# Allegro board OC_Connect-1_DEBUG_Life-3.brd
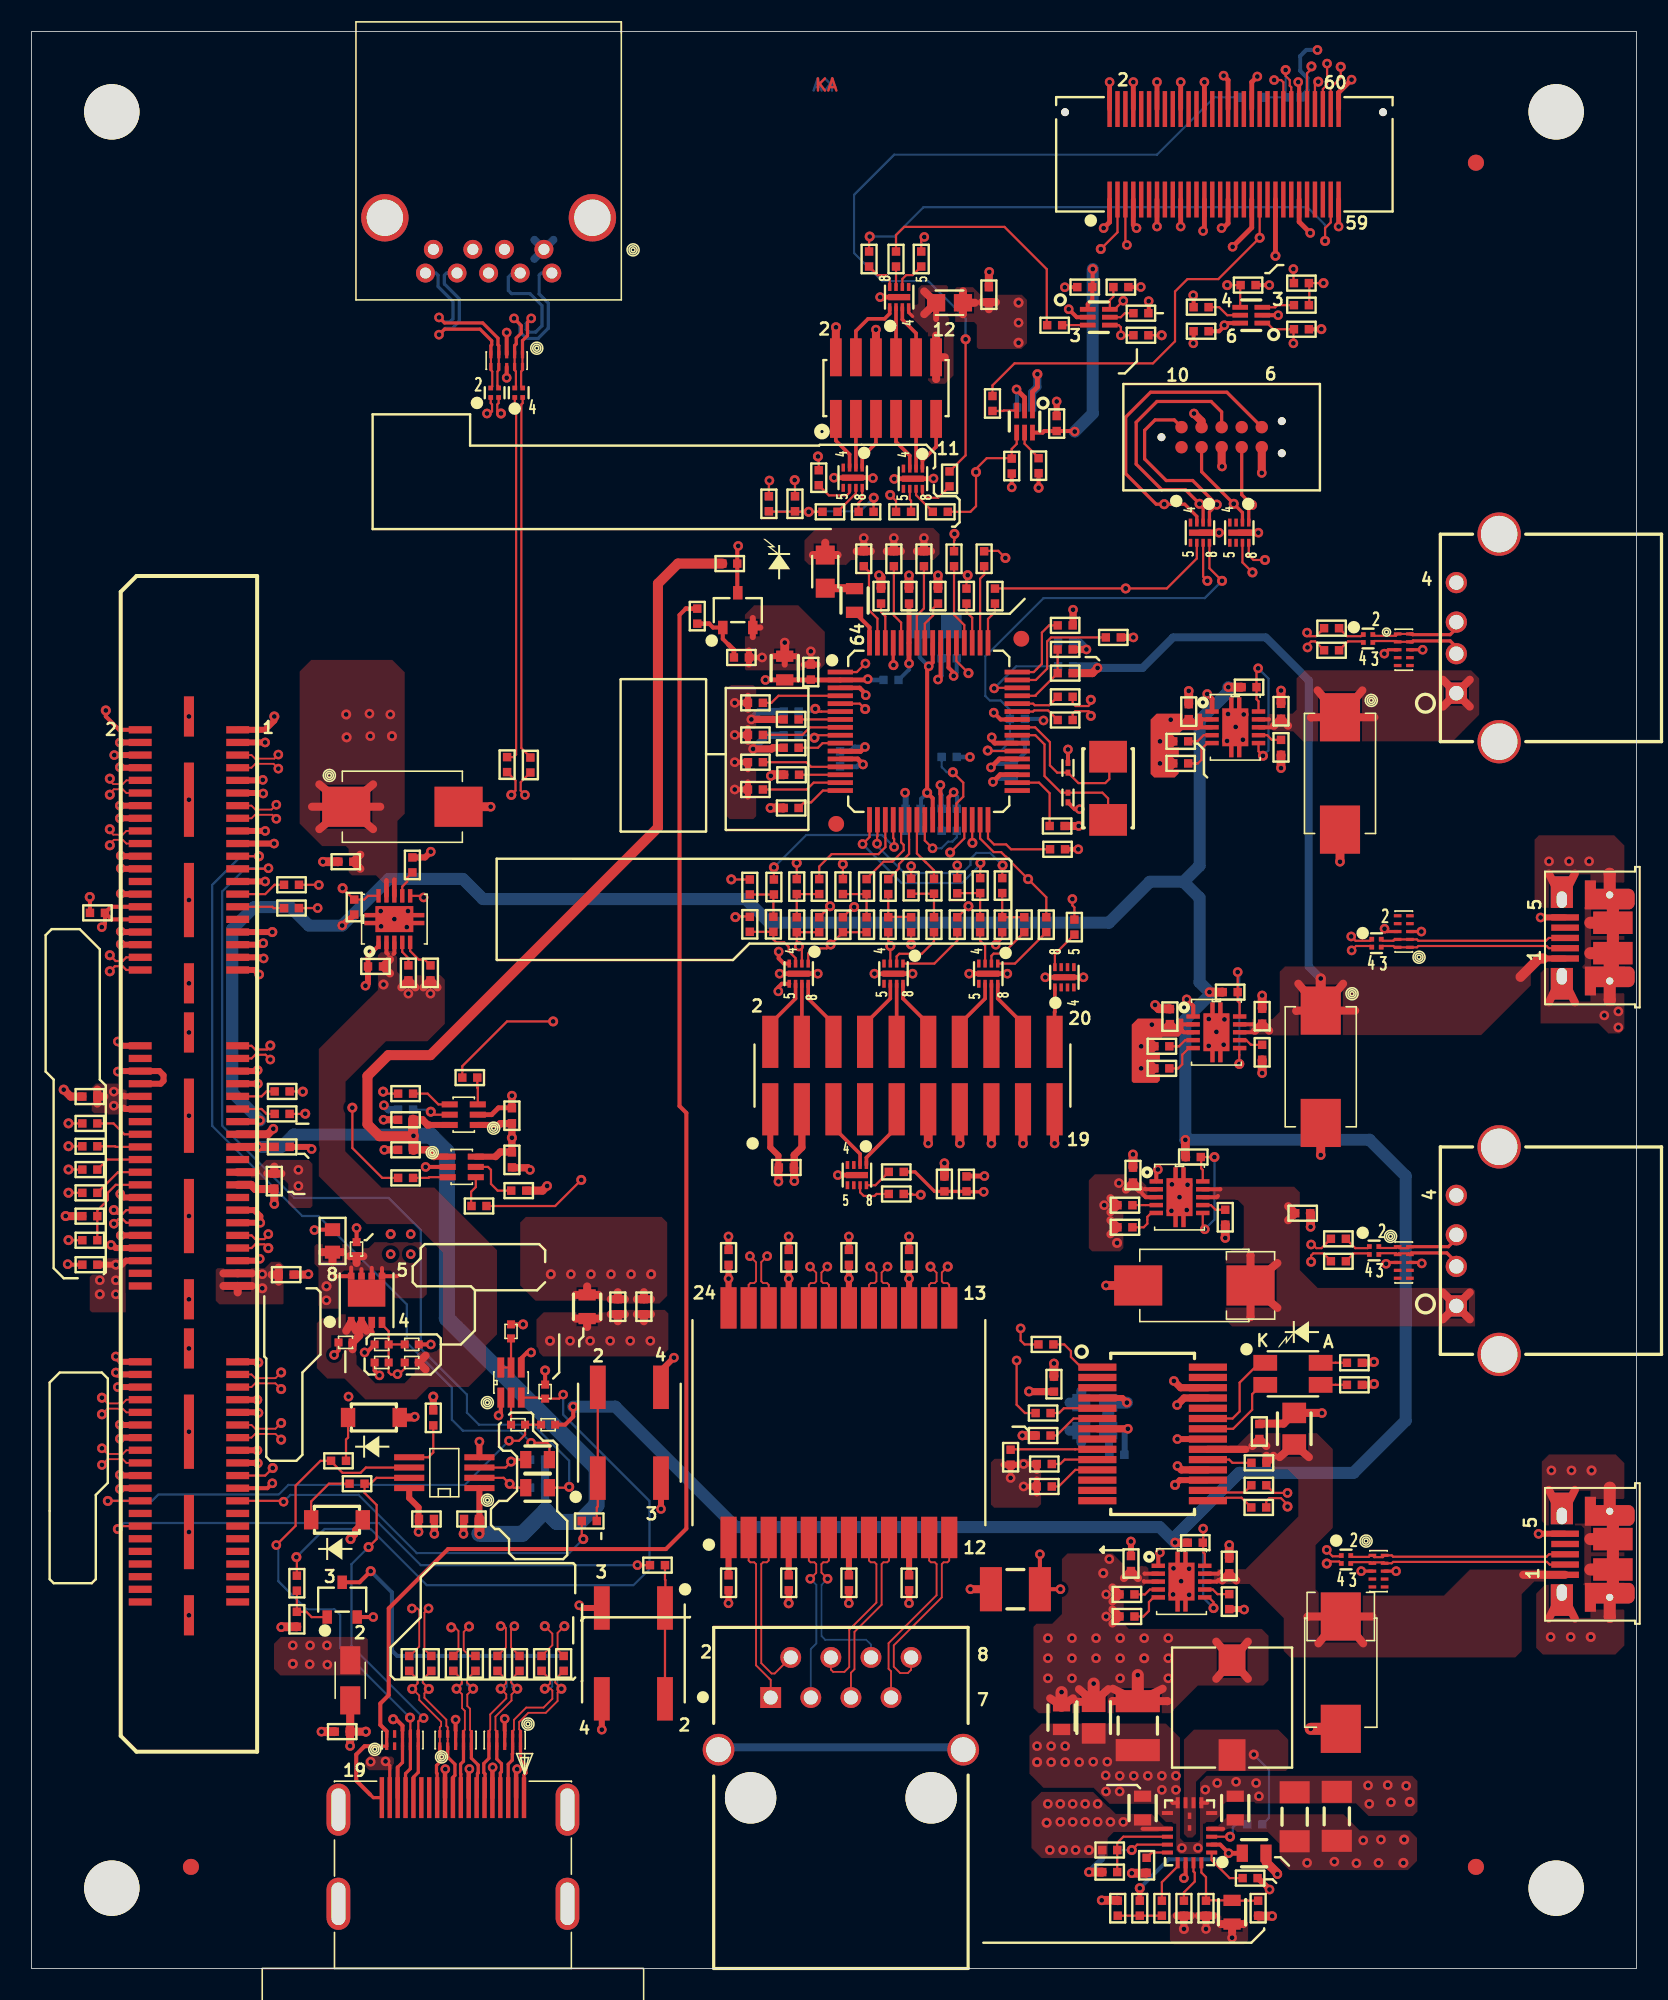
[diagram p0: board, top side]
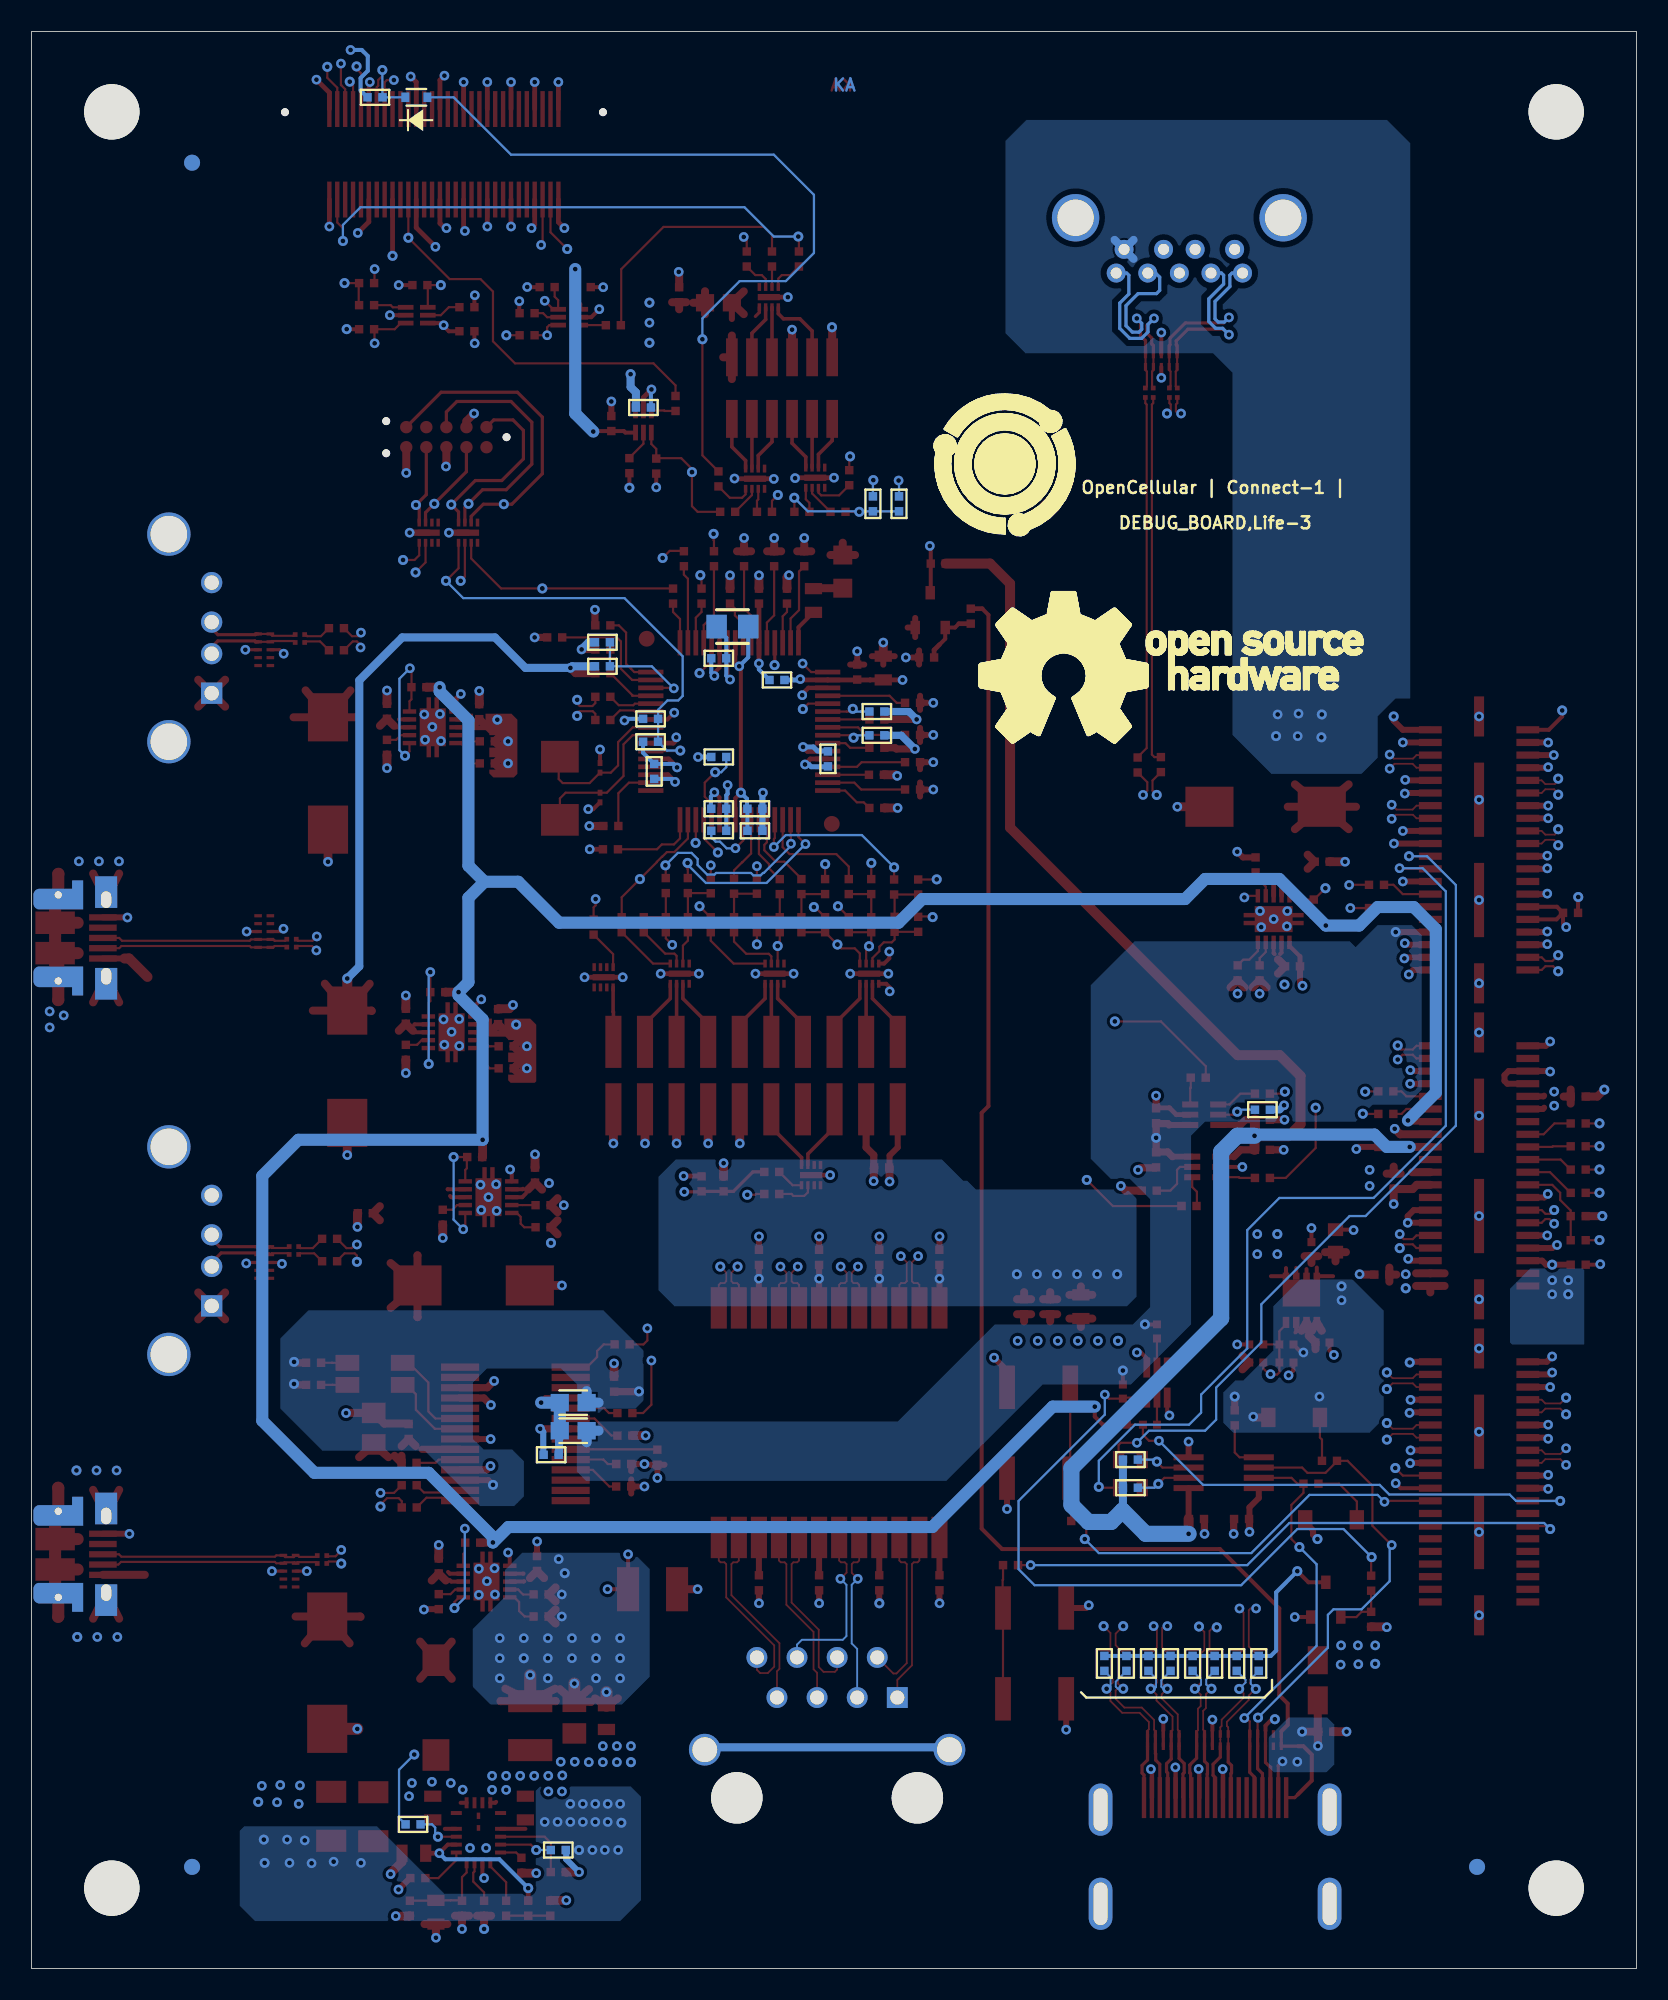
[diagram p1: board, bottom side, seen from below]

Outline 101.6 x 122.6 mm; copper layers: TOP, L2_GND, L3_SIG1, L4_SIG2, L5_PWR, BOTTOM. Coordinates in mm from the lower left corner of the outline.
Outline path: 0,122.6 0,0 101.6,0 101.6,122.6 0,122.6

## Design rules (mm)
constraint set DEFAULT: min track width 0.14
net group DEBUG_USB3_RX0: nets DEBUG_USB3_RX0_N DEBUG_USB3_RX0_P
net group DEBUG_USB3_TX0_N: nets DEBUG_USB3_TX0_N USB3_TX0_C_N
net group DEBUG_USB3_TX0_P: nets DEBUG_USB3_TX0_P USB3_TX0_C_P
net group DIFFPAIR0: nets N219413 N219434
net group DIFFPAIR1: nets N351992 N352004
net group DIFFPAIR2: nets N352148 N352158
net group DIFFPAIR3: nets USB_DN2 USB_DP2
net group DIFFPAIR6: nets N232751 N232773
net group DIFFPAIR7: nets N234973 N234985
net group DP3: nets UNNAMED_53_CHOKE4P_I472_IN2 UNNAMED_53_CHOKE4P_I472_OUT1
net group DP4: nets UNNAMED_53_CHOKE4P_I473_IN2 UNNAMED_53_CHOKE4P_I473_OUT1
net group DP5: nets GBE_MDI3N_DEBUG_C GBE_MDI3P_DEBUG_C
net group DP6: nets GBE_MDI2N_DEBUG_C GBE_MDI2P_DEBUG_C
net group DP7: nets GBE_MDI3N_DEBUG GBE_MDI3P_DEBUG
net group DP8: nets GBE_MDI1N_DEBUG_C GBE_MDI1P_DEBUG_C
net group DP9: nets GBE_MDI0N_DEBUG_C GBE_MDI0P_DEBUG_C
net group DP10: nets GBE_MDI0N_DEBUG GBE_MDI0P_DEBUG
net group DP11: nets GBE_MDI1N_DEBUG GBE_MDI1P_DEBUG
net group DP14: nets GBE_MDI2N_DEBUG GBE_MDI2P_DEBUG
net group DP15: nets C_USB_DN2 C_USB_DP2
net group DP16: nets C_ICDI_USB0DM C_ICDI_USB0DP
net group DP17: nets C_USB_DN1 C_USB_DP1
net group DP18: nets ICDI_USB0DM ICDI_USB0DP
net group DP19: nets USB_DN1 USB_DP1
net group DP20: nets USB_P_DN3 USB_P_DP3
net group HDMI_CLK_C_D: nets HDMI_CLK_DN HDMI_CLK_DP
net group HDMI_DATA0_C_D: nets HDMI_DATA0_DN HDMI_DATA0_DP
net group HDMI_DATA1_D: nets HDMI_DATA1_DN HDMI_DATA1_DP
net group HDMI_DATA2_DN: nets HDMI_DATA2_C_DN HDMI_DATA2_DN
net group HDMI_DATA2_DP: nets HDMI_DATA2_C_DP HDMI_DATA2_DP
net group HDMI_DDPC_SCL: nets HDMI_DDPC_SCL UNNAMED_18_RESN_I63_B
net group HDMI_DDPC_SDA: nets HDMI_DDPC_SDA UNNAMED_18_RESN_I62_B
net group HDMI_DDSP_HPD: nets HDMI_DDSP_HPD N385160
net group HDMI_SMB_SOC_CLK: nets HDMI_SMB_SOC_CLK PCU2_SMB_CLK
net group HDMI_SMB_SOC_DAT: nets HDMI_SMB_SOC_DAT PCU2_SMB_DAT
net group SLP_3P3_S0IX_B: nets SLP_3P3_S0IX_B UNNAMED_54_FET_I18_B
net group SOC_SLP_S0IX_B: nets SOC_SLP_S0IX_B UNNAMED_54_MOSFETNDUAL6P_I46_G1
net group N506634: nets N506634 UNNAMED_31_RESN_I19_A UNNAMED_31_RESN_I22_A UNNAMED_31_RESN_I23_A UNNAMED_31_RESN_I24_A
nets with their own width: min track width 0.762; nets V3P3_FT232

## Placement (name value [footprint] x y rotation side)
C1  10pF  [CC0201]  65.61 76 270 top
C1C5  0.1UF  [SMC0402A]  20.57 45.09 180 top
C1C6  0.1UF  [SMC0402A]  21.72 39.5 90 top
C1C8  0.01UF  [SMC0402A]  23.62 39.5 90 top
C1C9  1UF  [SMC0402A]  20.32 39.62 270 top
C1D1  220UF  [SMC7343_80TALL]  82.83 75.64 0 top
C1D2  220UF  [SMC7343_80TALL]  23.47 73.53 90 top
C1D3  220UF  [SMC7343_80TALL]  81.61 57.07 0 top
C1P1  0.1UF  [CC0402]  69.73 50.22 90 top
C1P2  0.1UF  [CC0402]  80.47 47.8 0 top
C1P3  220UF  [SMC7343_173TALL]  77.17 43.23 270 top
C1P4  0.1UF  [CC0402]  69.6 25.63 90 top
C1P5  0.1UF  [CC0402]  75.82 25.48 90 top
C1P6  220UF  [SMC7343_173TALL]  82.88 22.28 0 top
C2  10pF  [CC0201]  65.61 74.12 90 top
C2B1  0.01UF  [CC0402]  51.19 76.56 270 bottom
C2B2  0.01UF  [CC0402]  62.18 75.77 270 bottom
C2B3  0.01UF  [CC0402]  58.09 73.41 0 bottom
C2L1  0.1UF  [CC0402]  30.41 53.98 90 top
C2L2  0.1UF  [CC0402]  23.68 53.72 0 top
C2L3  0.1UF  [CC0402]  23.68 51.82 0 top
C2L4  0.1UF  [CC0402]  30.41 51.18 270 top
C2M1  0.1UF  [CC0402]  47.93 45.01 270 top
C2M2  0.1UF  [CC0402]  55.55 45.01 270 top
C2M3  0.1UF  [CC0402]  51.74 45.01 270 top
C2M4  0.1UF  [CC0402]  44.12 45.01 270 top
C2N1  1UF  [CC0603]  47.68 82.31 90 top
C2N2  0.1UF  [CC0402]  49.33 82.06 90 top
C2N3  2.2UF  [RC0805]  57.23 84.94 0 bottom
C2N4  0.1UF  [CC0402]  58.09 82.93 180 bottom
C2N5  0.1UF  [CC0402]  55.81 73.41 180 bottom
C2N6  0.1UF  [CC0402]  55.81 72.01 180 bottom
C3  1000PF  [CC0603]  35.17 41.88 270 top
C3P1  0.1UF  [CC0402]  64.72 36.98 90 top
C3P2  4.7UF  [CC0805]  79.94 34.16 90 top
C3P3  0.1UF  [CC0402]  77.73 33.99 90 top
C3P4  0.1UF  [CC0402]  25 28.45 0 top
C3P5  0.1UF  [CC0402]  27.85 28.45 0 top
C3P14  0.1UF  [CC0402]  68.71 32.51 0 bottom
C4  10NF  [CC0402]  37.11 41.88 270 top
C4B1  1000PF  [CC1210]  62.29 24 0 top
C4N1  0.1UF  [CC0402]  23.91 19.3 270 top
C4N2  0.1UF  [CC0402]  25.3 19.3 270 top
C4N3  0.1UF  [CC0402]  26.7 19.3 270 top
C4N4  0.1UF  [CC0402]  28.1 19.3 270 top
C4N5  0.1UF  [CC0402]  29.49 19.3 270 top
C4N6  0.1UF  [CC0402]  30.89 19.3 270 top
C4N7  0.1UF  [CC0402]  32.29 19.3 270 top
C4N8  0.1UF  [CC0402]  33.68 19.3 270 top
C4N9  0.1UF  [CC0402]  19.66 14.99 180 top
C4N15  10UF  [SMC0603]  19.05 45.34 90 top
C4P1  0.1UF  [CC0402]  79.1 79.58 90 top
C4P2  0.1UF  [CC0402]  73.26 79.55 90 top
C4P3  0.1UF  [CC0402]  30.1 76.2 270 top
C4P4  0.1UF  [CC0402]  31.58 76.17 270 top
C4P5  0.1UF  [CC0402]  19.89 70.05 180 top
C4P6  0.1UF  [CC0402]  21.77 63.42 180 top
C4P7  0.1UF  [CC0402]  77.91 60.27 90 top
C4P8  0.1UF  [CC0402]  72.06 60.25 90 top
C5  0.1uF  [CC0402]  38.76 41.88 270 top
C6  0.1uF  [CC0402]  3.69 44.55 180 top
C7  0.1uF  [CC0402]  47.78 50.7 0 top
C8  0.1uF  [CC0402]  3.69 55.19 180 top
C9  1uF  [CC0603]  65.21 15.88 270 top
C10  4.7UF  [CC0805]  67.24 15.88 270 top
C11  100uF  [CC1210]  70.03 15.37 270 top
C12  1uF  [CC0603]  70.34 10.15 90 top
C13  1uF  [CC0603]  76.2 10.15 90 top
C14  10uF  [CC1206]  82.63 9.63 90 top
C15  10uF  [CC1206]  79.96 9.6 90 top
C16  1uF  [CC0603]  77.4 7.29 0 top
C17  0.1uF  [CC0402]  70.59 6.53 270 top
C18  10pF  [CC0402]  74.35 3.81 270 top
C19  0.1uF  [CC0402]  62.41 79.1 0 bottom
C20  0.1uF  [CC0402]  15.37 49.83 270 top
C21  0.1uF  [CC0402]  15.86 52 0 top
C22  0.1uF  [CC0402]  77.45 9.12 0 bottom
C1990  0.1uF  [CC0402]  16.12 43.92 0 top
C2079  0.1uF  [CC0402]  60.6 105.94 270 top
C2100  0.1uF  [CC0402]  64.9 97.79 90 top
C2101  0.1uF  [CC0402]  62.87 98.81 180 bottom
C2102  0.1uF  [CC0402]  74.04 103.63 180 top
C2103  0.1uF  [CC0402]  80.39 103.76 0 top
C2104  0.1uF  [CC0402]  68.96 106.43 0 top
C2105  0.1uF  [CC0402]  66.67 106.43 180 top
C2138  0.1uF  [CC0402]  4.17 66.82 0 top
CR3P1  20V  [SOD123]  21.67 34.87 90 top
CR3P2  20V  [SOD123]  19.33 28.4 90 top
D1  GREEN  [LEDC2012X80N_1K]  50.25 88.42 90 top
D2  SML-LX1210IGC-TR  [LED_SM1210BC-SRHG]  79.86 37.64 90 top
D133  PMEG3002AEB  [SODFL1608X65N_AEE]  77.24 118.44 180 bottom
F4N1  0.5A  [SMFUSE_0805]  20.17 16.97 180 top
FB16  120E  [INDC1608X95M]  58.12 105.44 0 top
FB17  120E  [INDC1608X95M]  67.31 35.81 0 bottom
FB18  120E  [INDC1608X95M]  67.31 34.04 0 bottom
J1  TC2050-IDC-NL  [TAGCONNNECT_TC2050-IDC-NL]  72.8 96.29 0 top
J1N1  CONN_USB2A  [TYCO292303-1]  90.2 80.72 90 top
J1N2  USB - micro B USB 2.0  [USB2_10103594]  99.91 65.23 90 top
J1N3  CONN_USB2A  [TYCO292303-1]  90.2 41.94 90 top
J1N4  USB - micro B USB 2.0  [USB2_10103594]  99.91 26.21 90 top
J2  eJTAG Header_20  [SAMTEC_TMM-110-01-T-D-SM]  46.77 54.38 0 top
J3  SS-7188S-A-NF  [CON_SS-7188S-A_RJ45]  46.79 17.14 0 top
J4  QTE-060-03-L-D-A-GP  [QTE-060-01-L-D-A-GP]  9.96 50.8 270 top
J4N1  RCPT_HDMI_19P_4MTG_RA  [RCPT_HDMI_19P_05MM_RA_SM_H6P08]  26.67 6.6 0 top
J4P1  USB A USB 3.0  [USB3_10117835]  28.94 110.82 180 top
J118  eJTAG Header_12  [HARWIN_M50-3600642]  50.92 98.08 0 top
J119  DEBUG CONNECTOR  [SAMTEC_BSH-030-01-L-D-A-TR]  68.25 111.97 0 top
L1  2.2uH  [WURTH_744777910]  76 16.51 180 top
L1M1  749022016  [XFMR_749022016]  51.11 34.54 90 top
L1P1  90OHM  [CHK_DLP0NSN900HL2L]  84.99 45.44 0 top
L4P1  90OHM  [CHK_DLP0NSN900HL2L]  84.61 84.18 0 top
L4P2  90OHM  [CHK_DLP0NSN900HL2L]  29.32 99.74 90 top
L4P3  90OHM  [CHK_DLP0NSN900HL2L]  30.84 99.74 90 top
L4P4  90OHM  [CHK_DLP0NSN900HL2L]  85.14 64.9 0 top
L4P5  90OHM  [CHK_DLP0NSN900HL2L]  83.21 25.88 0 top
NOREF  -  []  15.78 0 90 top
NOREF#2  -  [unnamed#2]  5.08 5.08 0 top
NOREF#3  -  [unnamed#3]  10.09 6.43 0 top
NOREF#4  -  []  0 0 0 top
NOREF#5  -  [unnamed#2]  5.08 117.52 0 top
NOREF#6  -  []  5.08 117.52 0 top
NOREF#7  -  [unnamed#3]  91.44 114.3 0 top
NOREF#8  -  []  0 0 90 top
NOREF#9  -  []  96.52 5.08 90 top
NOREF#10  -  [unnamed#2]  96.52 117.52 0 top
NOREF#11  -  []  0 18.58 0 top
NOREF#12  -  [unnamed#3]  91.44 6.43 0 top
NOREF#13  -  [unnamed#2]  96.52 5.08 0 top
NOREF#14  -  [unnamed#3]  91.44 6.43 180 bottom
NOREF#15  -  [unnamed#3]  10.09 6.43 180 bottom
NOREF#16  -  [unnamed#3]  91.44 114.3 180 bottom
Q1C1  FET  [SOT95P251X112-3L]  44.71 85.98 0 top
Q1C2  FET  [SOT95P251X112-3L]  19.66 23.34 0 top
Q1C100  MOSFET_P_SING  [MOSFET_FDMC8878]  21.21 42.29 0 top
Q3N1  FDG6301N  [SC70_6P]  30.35 37.08 90 top
R1  10K  [RC0402]  52.68 89.23 90 top
R1C1  1K  [RC0402]  16.79 24.38 90 top
R1C2  619  [RC0402]  33.68 19.3 90 bottom
R1C3  619  [RC0402]  32.29 19.3 90 bottom
R1C4  619  [RC0402]  30.89 19.3 90 bottom
R1C5  619  [RC0402]  29.49 19.3 90 bottom
R1C6  619  [RC0402]  28.1 19.3 90 bottom
R1C7  619  [RC0402]  26.7 19.3 90 bottom
R1C8  619  [RC0402]  25.3 19.3 90 bottom
R1C9  619  [RC0402]  23.91 19.3 90 bottom
R1C16  100K  [SMR0402A]  22.61 38.35 270 top
R1C17  10K  [SMR0402A]  24.51 38.35 270 top
R1M1  75  [RC0402]  55.55 24.41 270 top
R1M2  75  [RC0402]  51.74 24.41 270 top
R1M3  75  [RC0402]  47.93 24.41 270 top
R1M4  75  [RC0402]  44.12 24.41 270 top
R1P1  10K  [RC0402]  73.55 51.36 0 top
R1P2  100K  [RC0402]  69.22 48.31 0 top
R1P3  100K  [RC0402]  69.22 46.91 0 top
R1P4  10K  [RC0402]  64.11 30.51 180 top
R1P5  10K  [RC0402]  73.67 26.95 0 top
R1P6  100K  [RC0402]  69.35 23.67 0 top
R1P7  100K  [RC0402]  69.35 22.28 0 top
R2  10K  [RC0402]  54.59 89.23 90 top
R2C4  4.7K  [SMR0402A]  30.35 40.77 0 top
R2C5  4.7K  [SMR0402A]  32.51 36.96 0 top
R2C6  0E  [SMR0402A]  31.24 34.42 270 top
R2C8  10K  [SMR0402A]  33.15 34.42 270 top
R3  10K  [RC0402]  56.49 89.23 90 top
R3A1  1K  [RC0402]  42.14 85.6 90 top
R3P1  10K  [RC0402]  25.43 34.85 270 top
R3P2  0  [RC0603]  32.03 32.21 180 top
R3P3  2.2K  [RC0402]  19.43 32.13 0 top
R3P4  2.2K  [RC0402]  20.6 30.68 180 top
R3P5  0  [RC0603]  32.03 30.43 180 top
R3P6  2.2K  [RC0402]  32.03 32.21 180 bottom
R3P7  2.2K  [RC0402]  32.03 30.43 180 bottom
R4  0E  [RC0402]  58.4 89.23 270 top
R4N1  100K  [RC0402]  44.94 82.98 0 top
R4P1  10K  [RC0402]  77.08 81.1 0 top
R4P2  100K  [RC0402]  72.75 77.67 0 top
R4P3  100K  [RC0402]  79.1 77.29 270 top
R4P4  100K  [RC0402]  72.75 76.28 0 top
R4P5  40.2K  [RC0402]  24.11 69.85 90 top
R4P6  10K  [RC0402]  20.43 67.18 90 top
R4P7  100K  [RC0402]  23.86 63.02 90 top
R4P8  100K  [RC0402]  25.25 63.02 90 top
R4P9  10K  [RC0402]  75.88 61.8 0 top
R4P10  100K  [RC0402]  71.56 58.37 0 top
R4P11  100K  [RC0402]  77.91 57.99 270 top
R4P12  100K  [RC0402]  71.56 56.97 0 top
R4P13  100K  [RC0402]  75.57 47.55 270 top
R4P14  100K  [RC0402]  75.82 23.22 270 top
R5  0E  [RC0402]  60.3 89.23 270 top
R6  10K  [RC0402]  44.2 88.93 0 top
R7  10K  [RC0402]  53.78 86.87 90 top
R8  33E  [RC0402]  55.55 86.87 90 top
R9  10K  [RC0402]  57.38 86.87 90 top
R10  0E  [RC0402]  59.19 86.87 270 top
R11  0E  [RC0402]  60.99 86.87 270 top
R12  330E  [RC0603]  52.1 86.59 90 top
R13  0  [RC0402]  82.3 84.84 180 top
R14  10K  [RC0402]  65.43 85.01 0 top
R15  0  [RC0402]  82.3 83.44 180 top
R16  10K  [RC0402]  68.48 84.25 0 top
R17  10K  [RC0402]  65.43 83.49 0 top
R18  0  [RC0402]  65.43 80.49 180 top
R19  10K  [RC0402]  45.83 80.11 180 top
R20  10K  [RC0402]  48.09 79.06 180 top
R21  0  [RC0402]  65.43 79.02 180 top
R22  10K  [RC0402]  45.83 78.08 180 top
R23  10K  [RC0402]  48.09 77.27 180 top
R24  10K  [RC0402]  45.83 76.35 180 top
R25  10K  [RC0402]  48.11 75.56 180 top
R26  10K  [RC0402]  45.83 74.63 180 top
R27  10K  [RC0402]  48.09 73.46 180 top
R28  0  [RC0402]  64.93 72.31 0 top
R30  0  [RC0402]  64.95 70.84 180 top
R32  0E  [RC0402]  60.05 68.54 90 top
R33  0E  [RC0402]  61.45 68.54 90 top
R34  0E  [RC0402]  58.6 68.53 270 top
R35  0E  [RC0402]  55.68 68.5 270 top
R36  0E  [RC0402]  57.13 68.5 90 top
R37  0E  [RC0402]  48.44 68.48 270 top
R38  0E  [RC0402]  49.86 68.48 90 top
R39  0E  [RC0402]  51.36 68.48 270 top
R40  0E  [RC0402]  52.86 68.48 90 top
R41  0E  [RC0402]  54.23 68.48 90 top
R42  0E  [RC0402]  45.47 68.45 270 top
R43  0E  [RC0402]  46.99 68.45 90 top
R46  0E  [RC0402]  45.47 66.09 90 top
R47  0E  [RC0402]  46.96 66.09 90 top
R48  0E  [RC0402]  48.44 66.07 90 top
R49  0E  [RC0402]  49.86 66.07 90 top
R50  0E  [RC0402]  51.36 66.07 90 top
R51  0E  [RC0402]  52.86 66.07 90 top
R52  0E  [RC0402]  54.23 66.07 90 top
R53  0E  [RC0402]  55.68 66.07 90 top
R54  0E  [RC0402]  57.13 66.07 90 top
R55  0  [RC0402]  58.6 66.07 270 top
R56  0  [RC0402]  60.05 66.07 270 top
R57  0E  [RC0402]  61.45 66.07 90 top
R58  0  [RC0402]  62.84 66.07 270 top
R59  0  [RC0402]  64.24 66.07 270 top
R60  0  [RC0402]  66.02 65.91 270 top
R63  0E  [RC0402]  3.69 46.09 180 top
R64  0  [RC0402]  27.74 56.39 0 top
R65  0  [RC0402]  23.68 55.37 180 top
R66  10K  [RC0402]  3.69 47.62 0 top
R67  0E  [RC0402]  3.69 49.09 180 top
R68  0E  [RC0402]  3.69 50.56 180 top
R69  0E  [RC0402]  3.69 52.04 180 top
R70  0  [RC0402]  54.74 50.42 0 top
R71  0  [RC0402]  23.68 50.04 180 top
R72  0E  [RC0402]  3.69 53.49 180 top
R73  0  [RC0402]  57.79 49.66 90 top
R74  10K  [RC0402]  59.19 49.66 270 top
R75  0  [RC0402]  54.74 49.02 0 top
R76  0  [RC0402]  28.33 48.26 180 top
R77  0  [RC0402]  82.73 46.18 180 top
R79  0  [RC0402]  82.73 44.76 180 top
R88  0  [RC0402]  64.22 39.5 180 top
R89  470  [RC0402]  83.75 38.34 180 top
R90  470  [RC0402]  83.75 36.94 180 top
R91  0  [RC0402]  64.04 35.15 180 top
R92  10K  [RC0402]  64.04 33.73 180 top
R93  10K  [RC0402]  61.98 32.36 270 top
R94  10K  [RC0402]  77.7 32 180 top
R95  10K  [RC0402]  64.11 31.93 180 top
R96  0  [RC0402]  77.7 30.58 180 top
R97  0  [RC0402]  77.69 29.18 180 top
R98  10K  [RC0402]  16.79 22.1 270 top
R99  100K  [RC0402]  68.25 7.49 180 top
R100  12K  [RC0402]  68.25 6.1 0 top
R101  0  [RC0402]  77.14 5.71 0 top
R102  10K  [RC0402]  68.76 3.81 90 top
R103  10K  [RC0402]  70.16 3.81 270 top
R104  0  [RC0402]  71.56 3.81 90 top
R105  100K  [RC0402]  72.95 3.81 90 top
R106  243K  [RC0402]  77.65 3.81 90 top
R107  1M  [RC0603]  76 3.56 270 top
R108  10K  [RC0402]  65.46 83.95 0 bottom
R109  5.6K  [RC0402]  65.46 82.42 0 bottom
R110  10K  [RC0402]  54.41 81.56 0 bottom
R111  10K  [RC0402]  48.09 79.56 180 bottom
R112  10K  [RC0402]  48.09 78.05 180 bottom
R113  10K  [RC0402]  62.41 77.65 180 bottom
R114  10K  [RC0402]  58.09 76.68 0 bottom
R115  10K  [RC0402]  58.09 72.01 0 bottom
R120  10K  [RC0402]  23.68 54.36 180 bottom
R122  0E  [RC0402]  15.86 54.09 180 top
R123  0E  [RC0402]  15.86 55.51 180 top
R124  0  [RC0402]  16.45 67.12 180 top
R125  0  [RC0402]  16.45 68.59 180 top
R126  41.2K  [RC0402]  68.25 7.49 180 bottom
R836  10K  [RC0402]  65.43 81.99 180 top
R10382  10K  [RC0402]  30.84 49.23 0 top
R10937  0  [RC0402]  52.83 92.2 0 top
R10938  0  [RC0402]  55.2 92.2 180 top
R10939  0  [RC0402]  57.53 92.2 0 top
R10942  0  [RC0402]  58.12 94.28 90 top
R10943  0  [RC0402]  49.83 94.36 90 top
R10947  0  [RC0402]  50.55 92.2 180 top
R10948  0  [RC0402]  53.02 108.2 270 top
R10949  0  [RC0402]  54.73 108.2 270 top
R10950  0  [RC0402]  56.32 108.2 270 top
R10951  100K  [RC0402]  79.86 118.44 180 bottom
R10952  0  [RC0402]  46.69 92.71 270 bottom
R10953  0  [RC0402]  46.68 92.71 270 top
R10954  0  [RC0402]  48.34 92.71 270 bottom
R10955  0  [RC0402]  48.33 92.71 270 top
R11018  10K  [RC0402]  63.75 95.12 270 top
R11020  0  [RC0402]  60.83 99.06 90 top
R11025  10K  [RC0402]  77.02 106.55 180 top
R11026  10K  [RC0402]  74.04 105.16 180 top
R11027  10K  [RC0402]  80.39 106.68 0 top
R11028  0  [RC0402]  80.39 105.28 0 top
R11029  10K  [RC0402]  70.23 103.38 180 top
R11030  10K  [RC0402]  70.23 104.78 0 top
R11032  0  [RC0402]  64.77 104.01 180 top
R11073  10K  [RC0402]  62.05 95.1 270 top
R11232  0E  [RC0402]  39.62 25.53 0 top
R11233  0E  [RC0402]  35.31 28.32 0 top
S4  SWITCH  [SW_B3SL-1022P]  38.1 19.94 90 top
S5  SWITCH  [SW_B3SL-1022P]  37.85 33.91 270 top
U1  IP4264CZ8  [SON40P135X170X55-9N]  73.97 90.88 270 top
U1P1  PUSB3F96  [XSON10_1X2P5_05MM]  30.08 101.77 180 top
U1P2  TPS2561  [MLF10_3X3_05MM_EP]  72.67 48.82 0 top
U1P3  IP4284CZ10  [XSON10_1X2P5_05MM]  86.87 44.69 270 top
U1P4  TPS2561  [MLF10_3X3_05MM_EP]  72.8 24.49 0 top
U2  IP4264CZ8  [SON40P135X170X55-9N]  76.46 90.88 270 top
U2L2  74AVC1T45  [SOT363]  28.25 53.39 180 top
U2L3  74AVC1T45  [SOT363]  26.34 51.38 0 top
U3  TM4C123GH6PM  [LQFP50P1200X1200X160-64N_TI]  56.8 78.31 0 top
U3P1  PCA9517A  [SSOP8_65MM_3W]  28.35 30.4 180 top
U4  IP4264CZ8  [SON40P135X170X55-9N]  48.57 62.97 270 top
U4N1  IP4284CZ10  [XSON10_1X2P5_05MM]  23.48 14.45 0 top
U4N2  PUSB3F96  [XSON10_1X2P5_05MM]  26.84 14.45 0 top
U4N3  PUSB3F96  [XSON10_1X2P5_05MM]  29.95 14.45 180 top
U4P1  PUSB3F96  [XSON10_1X2P5_05MM]  86.87 83.47 270 top
U4P2  TPS2561  [MLF10_3X3_05MM_EP]  76.2 78.56 0 top
U4P3  TPS2561  [MLF10_3X3_05MM_EP]  22.97 66.42 90 top
U4P4  IP4284CZ10  [XSON10_1X2P5_05MM]  86.87 65.63 90 top
U4P5  TPS2561  [MLF10_3X3_05MM_EP]  75.01 59.26 0 top
U4P6  PUSB3F96  [XSON10_1X2P5_05MM]  85.27 25.15 270 top
U5  IP4264CZ8  [SON40P135X170X55-9N]  54.57 62.97 270 top
U6  IP4264CZ8  [SON40P135X170X55-9N]  60.57 62.97 270 top
U7  IP4264CZ8  [SON40P135X170X55-9N]  65.38 62.74 90 top
U8  IP4264CZ8  [SON40P135X170X55-9N]  52.25 50.22 270 top
U9  FT232RL  [SSOP65P780_28]  70.97 33.83 0 top
U10  LT8640EUDC  [QFN50P300X400X80-20N]  73.31 8.59 270 top
U273  IP4264CZ8  [SON40P135X170X55-9N]  51.99 94.36 270 top
U274  IP4264CZ8  [SON40P135X170X55-9N]  55.8 94.3 270 top
U275  IP4264CZ8  [SON40P135X170X55-9N]  54.93 105.79 90 top
U289  SN74AVC1T45DRLR  [SOT-533_6P]  62.87 97.92 180 top
U290  SN74AVC1T45DRLR  [SOT-533_6P]  77.22 104.65 90 top
U291  SN74AVC1T45DRLR  [SOT-533_6P]  67.56 104.52 270 top
X1  16.000000MHZ  [XTAL_NX5032GA]  68.15 74.7 90 top

## Library data of the parts
C1-C4 C4B1 C5-C8 C17 C19-C22 C1990 C2079 C2100-C2105 C2138 = CAP_CER_0.1UF_10V_10%_X5R_0402
C1C5 C1C9 C2L1-C2L4 C2M1-C2M4 C4N1-C4N8 C4N15 = CAPN#2: signal model: CAPACITOR20PF
C1C6 C1C8 C2B1-C2B3 C2N1-C2N6 = CAPN#1: signal model: CAPACITOR20PF
C1D1-C1D3 C1P3 C1P6 = CAP_P: signal model: CAPACITOR20PF
C1P1 C1P2 C1P4 C1P5 C4N9 C4P1-C4P8 = CAPN: signal model: CAPACITOR20PF; room: 100
C3P1 C3P3 C3P14 = CAPN: signal model: CAPACITOR20PF
C3P2 C9-C16 C18 = CAP-NP_1
C3P4 C3P5 = CAPN#2: signal model: CAPACITOR20PF; room: 100
CR3P1 = SCHOTTKY: room: 100
CR3P2 = SCHOTTKY
D1 = LED_1
D2 = LED_DUAL_RED/GREEN_CLR_1210_SMD
D133 = DIODE_SCHOTTKY_30V_0.2A SOD523
F4N1 = FUSE_SMT
FB16-FB18 = FB_1
J1 = eJTAG Header_1
J1N1 J1N3 = CONN_USB2A_5
J1N2 = CONN_USB2A_12
J1N4 = CONN_USB2A_11
J2 = eJTAG Header_6
J3 = CON8_2
J4 = QTE-060-01-L-D-A-GP_2
J4N1 = RCPT_HDMI_19P_4MTG_RA: room: 100
J4P1 = CONN_USB3A_3
J118 = eJTAG Header_13
J119 = DEBUG CONNECTOR
L1 = INDUCTOR_2.8uH
L1M1 = TRANS-DA2125_0
L1P1 = CHOKE_0: signal model: CHOKE_4P
L4P1 L4P4 L4P5 = CHOKE_4P#1: signal model: CHOKE_4P
L4P2 L4P3 = CHOKE_4P
Q1C1 = FET
Q1C2 = FET#1
Q1C100 = MOSFET_P_SING_0
Q3N1 = MOSFETN_DUAL_6P
R1-R3 R6-R9 R12 R14 R16 R17 R19 R20 R22-R27 R66 R74 R92-R95 R98 R102 R103 R106-R115 R120 R126 R836 R10382 R11018 R11025-R11027 R11029 R11030 R11073 = R_1
R1C1-R1C9 R1M1-R1M4 R2C5 R2C6 R3P3-R3P7 R4P2 R4P7 R4P10 = RESN#1: signal model: RESISTOR50
R1C16 R1C17 R1P1 R1P4 R1P5 R2C4 R2C8 R3A1 R3P1 R4N1 R4P9 = RESN: signal model: RESISTOR50
R1P2 R1P3 R1P6 R1P7 R3P2 R4P3-R4P5 R4P8 R4P11-R4P14 = RESN#1: signal model: RESISTOR50; room: 100
R4 R5 R10 R11 R32-R43 R46-R60 R63 R67-R70 R72 R73 R75 R99-R101 R104 R105 R122-R125 R10937-R10939 R10942 R10943 R10947-R10955 R11020 R11028 R11032 R11232 R11233 = RES_1.0_OHM_1/16W_0402_SMD
R4P1 R4P6 = RESN_0: signal model: RESISTOR50
R13 R15 R18 R21 R28 R30 R64 R65 R71 R76 R77 R79 R88 R91 R96 R97 = RES_0.0_OHM_1/16W_0402_SMD
R89 R90 = RES_470_OHM_1/10W_5%_0402_SMD
S4 S5 = SWITCH_1
U1 U2 U4-U8 U273-U275 = TMP_152748
U1P1 U1P3 = IP4284CZ10: room: 100
U1P2 U1P4 = TPS2561_9
U2L2 U2L3 = 74AVC1T45
U3 = TM4C123GH6PM_SH
U3P1 = PCA9517A
U4N1-U4N3 = IP4284CZ10
U4P1 U4P4 U4P6 = IP4284CZ10_1: room: 100
U4P2 U4P3 U4P5 = TPS2561_8
U9 = IC_USB_SER_CONV_FT232RL_4
U10 = LT8610EMSE-EMSE16_0
U289-U291 = SN74LVC1T45DRLR_0
X1 = XTAL_4P_0

## Footprints (pads in the part's own frame, mm; a bottom-side part is the same pattern mirrored in y, then rotated)
CC0201
  rect 0.381x0.305 smd: 1(-0.305,0) 2(0.305,0)
CC0402
  rect 0.533x0.533 smd: 1(-0.475,0) 2(0.475,0)
CC0603
  rect 0.711x1.092 smd: 1(-0.75,0) 2(0.75,0)
CC0805
  rect 1.295x1.499 smd: 1(-1,0) 2(1,0)
CC1206
  rect 1.397x1.905 smd: 1(-1.55,0) 2(1.55,0)
CC1210
  rect 1.397x2.794 smd: 1(-1.55,0) 2(1.55,0)
CHK_DLP0NSN900HL2L
  rect 0.3x0.3 smd: 1(-0.3,0.25) 2(0.3,0.25) 3(0.3,-0.25) 4(-0.3,-0.25)
CON_SS-7188S-A_RJ45
  round 3.251 hole 3.251 unplated: (-1.27,-6.35) (10.16,-6.35)
  rect 1.321x1.321 hole 0.889: 1(0,0)
  round 1.321 hole 0.889: 2(1.27,2.54) 3(2.54,0) 4(3.81,2.54) 5(5.08,0) 6(6.35,2.54) 7(7.62,0) 8(8.89,2.54)
  round 2.007 hole 1.575: 9(-3.3,-3.3) 10(12.19,-3.3)
HARWIN_M50-3600642
  rect 0.74x2.4 smd: 1(0,0) 2(0,3.9) 3(1.27,0) 4(1.27,3.9) 5(2.54,0) 6(2.54,3.9) 7(3.81,0) 8(3.81,3.9) 9(5.08,0) 10(5.08,3.9) 11(6.35,0) 12(6.35,3.9)
INDC1608X95M
  rect 1.15x1.1 smd: 1(-0.85,0) 2(0.85,0)
LED_SM1210BC-SRHG
  rect 1x1.5 smd: 1(0.699,1.753) 2(-0.699,1.753) 3(0.699,-1.753) 4(-0.699,-1.753)
LEDC2012X80N_1K
  rect 1.2x1.2 smd: 1(1.05,0) 2(-1.05,0)
LQFP50P1200X1200X160-64N_TI
  round 1 smd: (-5.86,-5.86) (5.86,5.86)
  rect 1.6x0.3 smd: 1(-5.6,3.75) 2(-5.6,3.25) 3(-5.6,2.75) 4(-5.6,2.25) 5(-5.6,1.75) 6(-5.6,1.25) 7(-5.6,0.75) 8(-5.6,0.25) 9(-5.6,-0.25) 10(-5.6,-0.75) 11(-5.6,-1.25) 12(-5.6,-1.75) 13(-5.6,-2.25) 14(-5.6,-2.75) 15(-5.6,-3.25) 16(-5.6,-3.75) 33(5.6,-3.75) 34(5.6,-3.25) 35(5.6,-2.75) 36(5.6,-2.25) 37(5.6,-1.75) 38(5.6,-1.25) 39(5.6,-0.75) 40(5.6,-0.25) 41(5.6,0.25) 42(5.6,0.75) 43(5.6,1.25) 44(5.6,1.75) 45(5.6,2.25) 46(5.6,2.75) 47(5.6,3.25) 48(5.6,3.75)
  rect 0.3x1.6 smd: 17(-3.75,-5.6) 18(-3.25,-5.6) 19(-2.75,-5.6) 20(-2.25,-5.6) 21(-1.75,-5.6) 22(-1.25,-5.6) 23(-0.75,-5.6) 24(-0.25,-5.6) 25(0.25,-5.6) 26(0.75,-5.6) 27(1.25,-5.6) 28(1.75,-5.6) 29(2.25,-5.6) 30(2.75,-5.6) 31(3.25,-5.6) 32(3.75,-5.6) 49(3.75,5.6) 50(3.25,5.6) 51(2.75,5.6) 52(2.25,5.6) 53(1.75,5.6) 54(1.25,5.6) 55(0.75,5.6) 56(0.25,5.6) 57(-0.25,5.6) 58(-0.75,5.6) 59(-1.25,5.6) 60(-1.75,5.6) 61(-2.25,5.6) 62(-2.75,5.6) 63(-3.25,5.6) 64(-3.75,5.6)
MLF10_3X3_05MM_EP
  rect 0.85x0.28 smd: 1(-1.472,1) 2(-1.472,0.5) 3(-1.472,0) 4(-1.472,-0.5) 5(-1.472,-1) 6(1.472,-1) 7(1.472,-0.5) 8(1.472,0) 9(1.472,0.5) 10(1.472,1)
  custom 1.65x3.8 smd: 11(0,0)
MOSFET_FDMC8878
  rect 2.37x1.7 smd: (0,0.45)
  rect 0.42x0.7 smd: 1(-0.975,-1.4) 2(-0.325,-1.4) 3(0.325,-1.4) 4(0.975,-1.4)
  rect 0.42x0.45 smd: 5(0.975,1.525) 6(0.325,1.525) 7(-0.325,1.525) 8(-0.975,1.525)
QFN50P300X400X80-20N
  rect 0.25x0.7 smd: 1(1.25,1.4) 2(0.75,1.4) 3(0.25,1.4) 4(-0.25,1.4) 6(-1.25,1.4) 11(-1.25,-1.4) 13(-0.25,-1.4) 14(0.25,-1.4) 15(0.75,-1.4) 16(1.25,-1.4)
  rect 0.7x0.25 smd: 7(-1.9,0.75) 8(-1.9,0.25) 9(-1.9,-0.25) 10(-1.9,-0.75) 17(1.9,-0.75) 18(1.9,-0.25) 19(1.9,0.25) 20(1.9,0.75)
  rect 0.4x0.22 smd: 21(-1.075,0)
  rect 0.36x0.22 smd: 22(-0.305,0)
QTE-060-01-L-D-A-GP
  round 0 hole 1.016 unplated: (-29.242,2.032) (29.242,2.032)
  rect 0.457x1.448 smd: 1(-27.603,3.086) 2(-27.603,-3.086) 3(-26.803,3.086) 4(-26.803,-3.086) 5(-26.003,3.086) 6(-26.003,-3.086) 7(-25.203,3.086) 8(-25.203,-3.086) 9(-24.403,3.086) 10(-24.403,-3.086) 11(-23.603,3.086) 12(-23.603,-3.086) 13(-22.803,3.086) 14(-22.803,-3.086) 15(-22.003,3.086) 16(-22.003,-3.086) 17(-21.203,3.086) 18(-21.203,-3.086) 19(-20.403,3.086) 20(-20.403,-3.086) 21(-19.602,3.086) 22(-19.602,-3.086) 23(-18.802,3.086) 24(-18.802,-3.086) 25(-18.002,3.086) 26(-18.002,-3.086) 27(-17.202,3.086) 28(-17.202,-3.086) 29(-16.402,3.086) 30(-16.402,-3.086) 31(-15.602,3.086) 32(-15.602,-3.086) 33(-14.802,3.086) 34(-14.802,-3.086) 35(-14.002,3.086) 36(-14.002,-3.086) 37(-13.202,3.086) 38(-13.202,-3.086) 39(-12.402,3.086) 40(-12.402,-3.086) 41(-7.601,3.086) 42(-7.601,-3.086) 43(-6.801,3.086) 44(-6.801,-3.086) 45(-6.001,3.086) 46(-6.001,-3.086) 47(-5.201,3.086) 48(-5.201,-3.086) 49(-4.401,3.086) 50(-4.401,-3.086) 51(-3.6,3.086) 52(-3.6,-3.086) 53(-2.8,3.086) 54(-2.8,-3.086) 55(-2,3.086) 56(-2,-3.086) 57(-1.2,3.086) 58(-1.2,-3.086) 59(-0.4,3.086) 60(-0.4,-3.086) 61(0.4,3.086) 62(0.4,-3.086) 63(1.2,3.086) 64(1.2,-3.086) 65(2,3.086) 66(2,-3.086) 67(2.8,3.086) 68(2.8,-3.086) 69(3.6,3.086) 70(3.6,-3.086) 71(4.401,3.086) 72(4.401,-3.086) 73(5.201,3.086) 74(5.201,-3.086) 75(6.001,3.086) 76(6.001,-3.086) 77(6.801,3.086) 78(6.801,-3.086) 79(7.601,3.086) 80(7.601,-3.086) 81(12.402,3.086) 82(12.402,-3.086) 83(13.202,3.086) 84(13.202,-3.086) 85(14.002,3.086) 86(14.002,-3.086) 87(14.802,3.086) 88(14.802,-3.086) 89(15.602,3.086) 90(15.602,-3.086) 91(16.402,3.086) 92(16.402,-3.086) 93(17.202,3.086) 94(17.202,-3.086) 95(18.002,3.086) 96(18.002,-3.086) 97(18.802,3.086) 98(18.802,-3.086) 99(19.602,3.086) 100(19.602,-3.086) 101(20.403,3.086) 102(20.403,-3.086) 103(21.203,3.086) 104(21.203,-3.086) 105(22.003,3.086) 106(22.003,-3.086) 107(22.803,3.086) 108(22.803,-3.086) 109(23.603,3.086) 110(23.603,-3.086) 111(24.403,3.086) 112(24.403,-3.086) 113(25.203,3.086) 114(25.203,-3.086) 115(26.003,3.086) 116(26.003,-3.086) 117(26.803,3.086) 118(26.803,-3.086) 119(27.603,3.086) 120(27.603,-3.086)
  rect 2.54x0.635 smd: SH1(-28.448,0) SH4(-11.557,0) SH5(-8.445,0) SH8(8.445,0) SH9(11.557,0) SH12(28.448,0)
  rect 4.699x0.635 smd: SH2(-23.177,0) SH3(-16.828,0) SH6(-3.175,0) SH7(3.175,0) SH10(16.828,0) SH11(23.177,0)
RC0402
  rect 0.533x0.533 smd: 1(-0.475,0) 2(0.475,0)
RC0603
  rect 0.711x1.092 smd: 1(-0.75,0) 2(0.75,0)
RC0805
  rect 1.295x1.499 smd: 1(-1,0) 2(1,0)
RCPT_HDMI_19P_05MM_RA_SM_H6P08
  rect 0.279x2.591 smd: 1(4.5,4.21) 2(4,4.21) 3(3.5,4.21) 4(3,4.21) 5(2.5,4.21) 6(2,4.21) 7(1.5,4.21) 8(1,4.21) 9(0.5,4.21) 10(0,4.21) 11(-0.5,4.21) 12(-1,4.21) 13(-1.5,4.21) 14(-2,4.21) 15(-2.5,4.21) 16(-3,4.21) 17(-3.5,4.21) 18(-4,4.21) 19(-4.5,4.21)
  oval 1.499x3.302 hole 0.889x2.692: MH1(-7.25,3.45) MH2(7.25,3.45) MH3(-7.25,-2.51) MH4(7.25,-2.51)
SAMTEC_BSH-030-01-L-D-A-TR
  round 0.5 hole 1.02 unplated: (-2.82,5.53) (17.31,5.53)
  rect 0.279x2.273 smd: 1(0,0) 2(0,5.728) 3(0.5,0) 4(0.5,5.728) 5(1,0) 6(1,5.728) 7(1.5,0) 8(1.5,5.728) 9(2,0) 10(2,5.728) 11(2.5,0) 12(2.5,5.728) 13(3,0) 14(3,5.728) 15(3.5,0) 16(3.5,5.728) 17(4,0) 18(4,5.728) 19(4.5,0) 20(4.5,5.728) 21(5,0) 22(5,5.728) 23(5.5,0) 24(5.5,5.728) 25(6,0) 26(6,5.728) 27(6.5,0) 28(6.5,5.728) 29(7,0) 30(7,5.728) 31(7.5,0) 32(7.5,5.728) 33(8,0) 34(8,5.728) 35(8.5,0) 36(8.5,5.728) 37(9,0) 38(9,5.728) 39(9.5,0) 40(9.5,5.728) 41(10,0) 42(10,5.728) 43(10.5,0) 44(10.5,5.728) 45(11,0) 46(11,5.728) 47(11.5,0) 48(11.5,5.728) 49(12,0) 50(12,5.728) 51(12.5,0) 52(12.5,5.728) 53(13,0) 54(13,5.728) 55(13.5,0) 56(13.5,5.728) 57(14,0) 58(14,5.728) 59(14.5,0) 60(14.5,5.728)
SAMTEC_TMM-110-01-T-D-SM
  rect 1.02x3.3 smd: 1(0,0) 2(0,4.27) 3(2,0) 4(2,4.27) 5(4,0) 6(4,4.27) 7(6,0) 8(6,4.27) 9(8,0) 10(8,4.27) 11(10,0) 12(10,4.27) 13(12,0) 14(12,4.27) 15(14,0) 16(14,4.27) 17(16,0) 18(16,4.27) 19(18,0) 20(18,4.27)
SC70_6P
  rect 1.27x0.432 smd: 1(-0.953,0.648) 2(-0.953,0) 3(-0.953,-0.648) 4(0.953,-0.648) 5(0.953,0) 6(0.953,0.648)
SMC0402A
  rect 0.508x0.508 smd: 1(0,0) 2(0,-0.889)
SMC0603
  rect 0.813x0.965 smd: 1(0,0) 2(1.422,0)
SMC7343_80TALL
  rect 2.54x3.048 smd: 1(0,3.556) 2(0,-3.556)
SMC7343_173TALL
  rect 2.54x3.048 smd: 1(0,0) 2(0,-7.112)
SMFUSE_0805
  rect 1.27x1.778 smd: 1(0,0) 2(0,-2.54)
SMR0402A
  rect 0.508x0.508 smd: 1(0,0) 2(0,-0.889)
SOD123
  rect 1.22x0.91 smd: 1(0,1.635) 2(0,-1.635)
SODFL1608X65N_AEE
  rect 0.5x0.6 smd: A(0.7,0) K(-0.7,0)
SON40P135X170X55-9N
  rect 0.5x0.22 smd: 1(-0.64,0.6) 2(-0.64,0.2) 3(-0.64,-0.2) 4(-0.64,-0.6) 5(0.64,-0.6) 6(0.64,-0.2) 7(0.64,0.2) 8(0.64,0.6)
  rect 0.4x1.4 smd: 9(0,0)
SOT95P251X112-3L
  rect 0.6x0.85 smd: 1(-0.95,-1.1) 2(0.95,-1.1) 3(0,1.1)
SOT363
  rect 1.016x0.381 smd: 1(0,0) 2(0,-0.65) 3(0,-1.3) 4(1.778,-1.3) 5(1.778,-0.65) 6(1.778,0)
SOT-533_6P
  rect 0.305x0.991 smd: 1(-0.5,-0.7) 2(0,-0.7) 3(0.5,-0.7) 4(0.5,0.7) 5(0,0.7) 6(-0.5,0.7)
SSOP8_65MM_3W
  rect 1.905x0.381 smd: 1(0,0) 2(0,-0.65) 3(0,-1.3) 4(0,-1.951) 5(4.445,-1.951) 6(4.445,-1.3) 7(4.445,-0.65) 8(4.445,0)
SSOP65P780_28
  rect 2.413x0.457 smd: 1(-3.5,4.225) 2(-3.5,3.575) 3(-3.5,2.925) 4(-3.5,2.275) 5(-3.5,1.625) 6(-3.5,0.975) 7(-3.5,0.325) 8(-3.5,-0.325) 9(-3.5,-0.975) 10(-3.5,-1.625) 11(-3.5,-2.275) 12(-3.5,-2.925) 13(-3.5,-3.575) 14(-3.5,-4.225) 15(3.5,-4.225) 16(3.5,-3.575) 17(3.5,-2.925) 18(3.5,-2.275) 19(3.5,-1.625) 20(3.5,-0.975) 21(3.5,-0.325) 22(3.5,0.325) 23(3.5,0.975) 24(3.5,1.625) 25(3.5,2.275) 26(3.5,2.925) 27(3.5,3.575) 28(3.5,4.225)
SW_B3SL-1022P
  rect 2.75x1 smd: 1(2.875,-2) 2(-2.875,-2) 3(2.875,2) 4(-2.875,2)
TAGCONNNECT_TC2050-IDC-NL
  round 0.5 hole 1 unplated: (-1.27,0.635) (6.35,1.651) (6.35,-0.381)
  round 0.787 smd: 1(0,0) 2(1.27,0) 3(2.54,0) 4(3.81,0) 5(5.08,0) 6(5.08,1.27) 7(3.81,1.27) 8(2.54,1.27) 9(1.27,1.27) 10(0,1.27)
TYCO292303-1
  rect 1.346x1.346 hole 0.914: 1(0,0)
  round 1.346 hole 0.914: 2(2.5,0) 3(4.5,0) 4(7,0)
  round 2.743 hole 2.311: S1(10.07,-2.71) S2(-3.07,-2.71)
unnamed#2
  round 3.5 hole 3.5 unplated: (0,0)
unnamed#3
  round 1.016 smd: (0,0)
USB2_10103594
  rect 0.4x1.75 smd: 1(-1.3,2.825) 2(-0.65,2.825) 3(0,2.825) 4(0.65,2.825) 5(1.3,2.825)
  rect 2x1.4 hole 1.05x0.65: SH1(-2.425,3.03) SH2(2.425,3.03)
  custom 1.825x3.15 hole 0.7x1.2: SH3(-2.725,0) SH6(2.725,0)
  rect 1.425x2.5 smd: SH4(-0.963,-0.2) SH5(0.963,-0.2)
USB3_10117835
  round 1.2 hole 0.7: 1(-3.5,2) 2(-1,2) 3(1,2) 4(3.5,2) 5(4,3.5) 6(2,3.5) 7(0,3.5) 8(-2,3.5) 9(-4,3.5)
  round 3 hole 2.3: SH1(-6.57,0) SH2(6.57,0)
WURTH_744777910
  rect 1.7x2 smd: 1(0,3) 2(0,-3)
XFMR_749022016
  rect 2.62x1.02 smd: 1(-7.264,6.985) 2(-7.264,5.715) 3(-7.264,4.445) 4(-7.264,3.175) 5(-7.264,1.905) 6(-7.264,0.635) 7(-7.264,-0.635) 8(-7.264,-1.905) 9(-7.264,-3.175) 10(-7.264,-4.445) 11(-7.264,-5.715) 12(-7.264,-6.985) 13(7.264,-6.985) 14(7.264,-5.715) 15(7.264,-4.445) 16(7.264,-3.175) 17(7.264,-1.905) 18(7.264,-0.635) 19(7.264,0.635) 20(7.264,1.905) 21(7.264,3.175) 22(7.264,4.445) 23(7.264,5.715) 24(7.264,6.985)
XSON10_1X2P5_05MM
  rect 0.203x0.483 smd: 1(-1,-0.388) 2(-0.5,-0.388) 3(0,-0.388) 4(0.5,-0.388) 5(1,-0.388) 6(1,0.388) 7(0.5,0.388) 8(0,0.388) 9(-0.5,0.388) 10(-1,0.388)
XTAL_NX5032GA
  rect 2.007x2.388 smd: 1(-2,0) 2(2,0)

## Nets
3.3VD_TIVA: C2B1.1(A[0]) C2B2.1(A[0]) C2B3.1(A[0]) C2N1.1(A[0]) C2N2.1(A[0]) C2N4.1(A[0]) C7.1(A[0]) C8.1(A[0]) C20.1(A[0]) J2.1 J4.50 J4.52 J4.61 R66.1(A[0]) R74.1(A[0]) R110.1(A[0]) R113.1(A[0]) R115.1(A[0]) U3.2(VDDA) U3.11(VDD) U3.26(VDD1) U3.37(VBAT) U3.42(VDD2) U3.54(VDD3) U4.4 U4.5
12V_VIN_TIVA: C12.1(A[0]) C13.1(A[0]) C14.1(A[0]) C15.1(A[0]) C1990.1(A[0]) J4.77 J4.79 R99.2(B[0]) U10.4(VIN1) U10.13(VIN2)
GND: C1.1(A[0]) C1C5.2(B[0]) C1C8.2(B[0]) C1C9.2(B[0]) C1D1.2(B[0]) C1D2.2(B[0]) C1D3.2(B[0]) C1P1.2(B[0]) C1P2.2(B[0]) C1P3.2(B[0]) C1P4.2(B[0]) C1P5.2(B[0]) C1P6.2(B[0]) C2.1(A[0]) C2B1.2(B[0]) C2B2.2(B[0]) C2B3.2(B[0]) C2L1.2(B[0]) C2L2.1(A[0]) C2L3.1(A[0]) C2L4.2(B[0]) C2M1.1(A[0]) C2M2.1(A[0]) C2M3.1(A[0]) C2M4.1(A[0]) C2N1.2(B[0]) C2N2.2(B[0]) C2N3.2(B[0]) C2N4.2(B[0]) C2N5.2(B[0]) C2N6.2(B[0]) C3.2(B[0]) C3P1.2(B[0]) C3P2.2(B[0]) C3P3.2(B[0]) C3P4.2(B[0]) C3P5.1(A[0]) C3P14.2(B[0]) C4.2(B[0]) C4B1.2(B[0]) C4N9.2(B[0]) C4N15.2(B[0]) C4P1.2(B[0]) C4P2.2(B[0]) C4P5.2(B[0]) C4P6.2(B[0]) C4P7.2(B[0]) C4P8.2(B[0]) C5.2(B[0]) C6.2(B[0]) C7.2(B[0]) C8.2(B[0]) C9.2(B[0]) C10.2(B[0]) C11.2(B[0]) C12.2(B[0]) C13.2(B[0]) C14.2(B[0]) C15.2(B[0]) C16.2(B[0]) C17.2(B[0]) C19.2(B[0]) C20.2(B[0]) C21.2(B[0]) C1990.2(B[0]) C2079.1(A[0]) C2100.2(B[0]) C2101.2(B[0]) C2102.2(B[0]) C2103.2(B[0]) C2104.2(B[0]) C2105.2(B[0]) C2138.1(A[0]) D1.1(K) J1.3 J1.5 J1.9 J1N1.4(GND) J1N1.S1(MTG1) J1N1.S2(MTG2) J1N2.5(GND) J1N2.SH1 J1N2.SH2 J1N2.SH3 J1N2.SH4 J1N2.SH5 J1N2.SH6 J1N3.4(GND) J1N3.S1(MTG1) J1N3.S2(MTG2) J1N4.5(GND) J1N4.SH1 J1N4.SH2 J1N4.SH3 J1N4.SH4 J1N4.SH5 J1N4.SH6 J2.3 J2.11 J2.13 J2.15 J2.17 J2.19 J3.9 J3.10 J4.1 J4.3 J4.4 J4.6 J4.8 J4.9 J4.11 J4.14 J4.16 J4.17 J4.19 J4.22 J4.24 J4.25 J4.28 J4.34 J4.35 J4.36 J4.37 J4.39 J4.42 J4.45 J4.46 J4.47 J4.48 J4.55 J4.63 J4.66 J4.67 J4.69 J4.72 J4.74 J4.75 J4.81 J4.82 J4.84 J4.86 J4.87 J4.89 J4.92 J4.94 J4.95 J4.97 J4.100 J4.101 J4.102 J4.SH1 J4.SH2 J4.SH3 J4.SH4 J4.SH5 J4.SH6 J4.SH7 J4.SH8 J4.SH9 J4.SH10 J4.SH11 J4.SH12 J4N1.2(IO2) J4N1.5(IO5) J4N1.8(IO8) J4N1.11(IO11) J4N1.17(IO17) J4N1.MH1 J4N1.MH2 J4N1.MH3 J4N1.MH4 J4P1.4(GND) J4P1.7(GND_DRAIN) J4P1.SH1 J4P1.SH2 J118.2 J118.6 J119.1 J119.2 J119.7 J119.8 J119.13 J119.14 J119.19 J119.20 J119.25 J119.26 J119.31 J119.32 J119.37 J119.38 J119.49 J119.50 J119.59 J119.60 Q1C1.2(E) Q1C2.2(E) Q3N1.1(S1) Q3N1.4(S2) R1.2(B[0]) R1C16.2(B[0]) R1P4.2(B[0]) R2.2(B[0]) R3.2(B[0]) R4N1.2(B[0]) R4P3.2(B[0]) R4P5.2(B[0]) R4P11.2(B[0]) R4P13.2(B[0]) R4P14.2(B[0]) R7.2(B[0]) R8.2(B[0]) R9.2(B[0]) R14.2(B[0]) R16.2(B[0]) R17.2(B[0]) R19.2(B[0]) R20.2(B[0]) R22.2(B[0]) R23.2(B[0]) R24.2(B[0]) R25.2(B[0]) R26.2(B[0]) R27.2(B[0]) R28.2(B[0]) R30.1(A[0]) R73.2(B[0]) R92.2(B[0]) R93.2(B[0]) R95.2(B[0]) R98.2(B[0]) R100.1(A[0]) R102.2(B[0]) R106.1(A[0]) R108.2(B[0]) R111.2(B[0]) R112.2(B[0]) R114.2(B[0]) R120.2(B[0]) R126.2(B[0]) R10382.2(B[0]) R11018.2(B[0]) R11026.2(B[0]) R11030.2(B[0]) R11073.2(B[0]) S4.3 S4.4 S5.3 S5.4 U1.9 U1P1.3(GND_3) U1P1.8(GND_8) U1P2.1(GND) U1P2.11(EXPAD) U1P3.3(GND_3) U1P3.8(GND_8) U1P4.1(GND) U1P4.11(EXPAD) U2.9 U2L2.2(GND) U2L3.2(GND) U3.3(GNDA) U3.12(GND) U3.27(GND1) U3.35(GNDX) U3.39(GND2) U3.55(GND3) U3P1.4(GND) U4.9 U4N1.3(GND_3) U4N1.8(GND_8) U4N2.3(GND_3) U4N2.8(GND_8) U4N3.3(GND_3) U4N3.8(GND_8) U4P1.3(GND_3) U4P1.8(GND_8) U4P2.1(GND) U4P2.11(EXPAD) U4P3.1(GND) U4P3.11(EXPAD) U4P4.3(GND_3) U4P4.8(GND_8) U4P5.1(GND) U4P5.11(EXPAD) U4P6.3(GND_3) U4P6.8(GND_8) U5.9 U6.9 U7.9 U8.9 U9.7(GND1) U9.18(GND2) U9.21(GND3) U9.25(AGND) U9.26(TEST) U10.6(GND1) U10.7(GND2) U10.10(GND3) U10.11(GND4) U10.18(GND) U273.9 U274.9 U275.9 U289.2(GND) U290.2(GND) U291.2(GND)
V1P5_LAN: C2M1.2(B[0]) C2M2.2(B[0]) C2M3.2(B[0]) C2M4.2(B[0]) C3.1(A[0]) C4.1(A[0]) C5.1(A[0]) C6.1(A[0]) J4.76 L1M1.15(TX_D) L1M1.18(TX_C) L1M1.21(TX_B) L1M1.24(TX_A)
V1P8_A: C2100.1(A[0]) C2102.1(A[0]) C2105.1(A[0]) J4.53 R1P1.1(A[0]) R1P5.1(A[0]) R2C8.1(A[0]) R4P1.1(A[0]) R4P6.1(A[0]) R4P9.1(A[0]) R11025.1(A[0]) U289.6(VCCB) U290.6(VCCB) U291.1(VCCA)
V1P8_S: C2L2.2(B[0]) C2L3.2(B[0]) C3P5.2(B[0]) C21.1(A[0]) J4.57 R3P6.1(A[0]) R3P7.1(A[0]) R6.1(A[0]) U2L2.6(VCCB) U2L3.1(VCCA) U3P1.1(VCCA)
V3P3_A: C2103.1(A[0]) C2104.1(A[0]) R11027.1(A[0]) R11029.1(A[0]) U290.1(VCCA) U291.6(VCCB)
V3P3_FT232: C3P14.1(A[0]) FB17.2 FB18.2 U9.4(VCCIO)
V3P3_OUT: C3P1.1(A[0]) FB17.1 R89.1 R90.1 U9.17(3V3OUT)
V3P3_S: C2L1.1(A[0]) C2L4.1(A[0]) FB18.1 J4.33 R2C4.1(A[0]) R2C5.1(A[0]) U2L2.1(VCCA) U2L3.6(VCCB)
V5_A: C1C9.1(A[0]) C1P1.1(A[0]) C1P4.1(A[0]) C4P2.1(A[0]) C4P6.1(A[0]) C4P8.1(A[0]) C9.1(A[0]) C10.1(A[0]) C11.1(A[0]) C18.2(B[0]) C2138.2(B[0]) J4.30 J4.32 L1.2(INB) Q1C100.1(S1) Q1C100.2(S2) Q1C100.3(S3) R1C17.1(A[0]) R1P2.1(A[0]) R1P3.1(A[0]) R1P6.1(A[0]) R1P7.1(A[0]) R4P2.1(A[0]) R4P4.1(A[0]) R4P7.1(A[0]) R4P8.1(A[0]) R4P10.1(A[0]) R4P12.1(A[0]) R101.2(B[0]) R105.1(A[0]) R107.2(B[0]) U1P2.2(IN_2) U1P2.3(IN_3) U1P4.2(IN_2) U1P4.3(IN_3) U4P2.2(IN_2) U4P2.3(IN_3) U4P3.2(IN_2) U4P3.3(IN_3) U4P5.2(IN_2) U4P5.3(IN_3)
V5_USB0_1: C1D1.1(A[0]) C4P1.1(A[0]) J1N1.1(VCC) U4P2.8(OUT2) U4P2.9(OUT1)
V5_USB0_2: C1P2.1(A[0]) C1P3.1(A[0]) J1N3.1(VCC) U1P2.8(OUT2) U1P2.9(OUT1)
V5_USB0_3: C1P5.1(A[0]) C1P6.1(A[0]) C3P2.1(A[0]) C3P3.1(A[0]) J1N4.1(VCC) R94.1(A[0]) U1P4.8(OUT2) U1P4.9(OUT1) U9.20(VCC)
V5_USB3_1: C1D2.1(A[0]) C4P5.1(A[0]) J4P1.1(VBUS) U4P3.8(OUT2) U4P3.9(OUT1)
C_ICDI_USB0DM: J1N2.2(DN) L4P4.3(IN_2) U4P4.1(CH1) U4P4.10(NC_10)
C_ICDI_USB0DP: J1N2.3(DP) L4P4.2(OUT_1) U4P4.2(CH2) U4P4.9(NC_9)
C_USB_DN1: J1N1.2(DN) L4P1.3(IN_2) U4P1.2(CH2) U4P1.9(NC_9)
C_USB_DN2: J1N3.2(DN) L1P1.3(IN_2) U1P3.2(CH2) U1P3.9(NC_9)
C_USB_DP1: J1N1.3(DP) L4P1.2(OUT_1) U4P1.1(CH1) U4P1.10(NC_10)
C_USB_DP2: J1N3.3(DP) L1P1.2(OUT_1) U1P3.1(CH1) U1P3.10(NC_10)
COM1_RXD_USB: R76.1(A[0]) R88.2(B[0])
COM1_TXD_USB: R64.1(A[0]) R91.2(B[0])
DEBUG_USB3_RX0_N: J4.71 L4P2.4(OUT_2)
DEBUG_USB3_RX0_P: J4.73 L4P2.1(IN_1)
DEBUG_USB3_TX0_N: C4P4.2(B[0]) J4.68
DEBUG_USB3_TX0_P: C4P3.2(B[0]) J4.70
DEBUGGER_JTAG_TDO: R10947.2(B[0]) R10953.2(B[0]) R10955.2(B[0])
ESD_ICDI_NRST: J1.10 U1.1
ESD_ICDI_TCK: J1.4 U2.1
ESD_ICDI_TDI: J1.8 U1.2
ESD_ICDI_TDO: J1.6 U1.3
ESD_ICDI_TMS: J1.2 U2.2
GBE_MDI0N_DEBUG: J4.85 L1M1.22(X-_A)
GBE_MDI0N_DEBUG_C: J3.2 L1M1.3(D-_A)
GBE_MDI0P_DEBUG: J4.83 L1M1.23(X+_A)
GBE_MDI0P_DEBUG_C: J3.1 L1M1.2(D+_A)
GBE_MDI1N_DEBUG: J4.90 L1M1.19(X-_B)
GBE_MDI1N_DEBUG_C: J3.6 L1M1.6(D-_B)
GBE_MDI1P_DEBUG: J4.88 L1M1.20(X+_B)
GBE_MDI1P_DEBUG_C: J3.3 L1M1.5(D+_B)
GBE_MDI2N_DEBUG: J4.91 L1M1.16(X-_C)
GBE_MDI2N_DEBUG_C: J3.5 L1M1.9(D-_C)
GBE_MDI2P_DEBUG: J4.93 L1M1.17(X+_C)
GBE_MDI2P_DEBUG_C: J3.4 L1M1.8(D+_C)
GBE_MDI3N_DEBUG: J4.96 L1M1.13(X-_D)
GBE_MDI3N_DEBUG_C: J3.8 L1M1.12(D-_D)
GBE_MDI3P_DEBUG: J4.98 L1M1.14(X+_D)
GBE_MDI3P_DEBUG_C: J3.7 L1M1.11(D+_D)
HDMI_CLK_C_DN: C4N1.2(B[0]) J4N1.12(IO12) R1C9.1(A[0]) U4N2.1(CH1) U4N2.10(NC_10)
HDMI_CLK_C_DP: C4N2.2(B[0]) J4N1.10(IO10) R1C8.1(A[0]) U4N2.2(CH2) U4N2.9(NC_9)
HDMI_CLK_DN: C4N1.1(A[0]) J4.20
HDMI_CLK_DP: C4N2.1(A[0]) J4.18
HDMI_DATA0_C_DN: C4N3.2(B[0]) J4N1.9(IO9) R1C7.1(A[0]) U4N2.4(CH3) U4N2.7(NC_7)
HDMI_DATA0_C_DP: C4N4.2(B[0]) J4N1.7(IO7) R1C6.1(A[0]) U4N2.5(CH4) U4N2.6(NC_6)
HDMI_DATA0_DN: C4N3.1(A[0]) J4.15
HDMI_DATA0_DP: C4N4.1(A[0]) J4.13
HDMI_DATA1_C_DN: C4N5.2(B[0]) J4N1.6(IO6) R1C5.1(A[0]) U4N3.5(CH4) U4N3.6(NC_6)
HDMI_DATA1_C_DP: C4N6.2(B[0]) J4N1.4(IO4) R1C4.1(A[0]) U4N3.4(CH3) U4N3.7(NC_7)
HDMI_DATA1_DN: C4N5.1(A[0]) J4.12
HDMI_DATA1_DP: C4N6.1(A[0]) J4.10
HDMI_DATA2_C_DN: C4N7.2(B[0]) J4N1.3(IO3) R1C3.1(A[0]) U4N3.2(CH2) U4N3.9(NC_9)
HDMI_DATA2_C_DP: C4N8.2(B[0]) J4N1.1(IO1) R1C2.1(A[0]) U4N3.1(CH1) U4N3.10(NC_10)
HDMI_DATA2_DN: C4N7.1(A[0]) J4.7
HDMI_DATA2_DP: C4N8.1(A[0]) J4.5
HDMI_DDPC_SCL: J4N1.15(IO15) R3P4.1(A[0]) U3P1.7(SCLB) U4N1.5(CH4) U4N1.6(NC_6)
HDMI_DDPC_SDA: J4N1.16(IO16) R3P3.1(A[0]) U3P1.6(SDAB) U4N1.4(CH3) U4N1.7(NC_7)
HDMI_DDSP_HPD: J4N1.19(IO19) R3A1.2(B[0]) U4N1.1(CH1) U4N1.10(NC_10)
HDMI_SMB_SOC_CLK: J4.23 R3P5.1(A[0])
HDMI_SMB_SOC_DAT: J4.21 R3P2.1(A[0])
ICD_RESET: R35.1(A[0]) R63.2(B[0])
ICD_TCK: R37.1(A[0]) R69.2(B[0])
ICD_TDI: R53.1(A[0]) R67.2(B[0])
ICD_TDO: R39.1(A[0]) R68.2(B[0])
ICD_TMS: R42.1(A[0]) R72.2(B[0])
ICDI_NRST: C19.1(A[0]) R113.2(B[0]) U1.8 U3.38(NRST)
ICDI_TCK: R4.1(A[0]) U2.8
ICDI_TDI: R5.1(A[0]) U1.7
ICDI_TDO: R11.1(A[0]) U1.6
ICDI_TMS: R10.1(A[0]) U2.7
ICDI_USB0DM: L4P4.4(OUT_2) R21.1(A[0])
ICDI_USB0DP: L4P4.1(IN_1) R18.1(A[0])
JATG_T_TRST: R59.1(A[0]) U3.31(PF3)
JTAG_DEBUGGER_PRDY: J119.5 R11027.2(B[0]) R11028.2(B[0])
JTAG_DEBUGGER_PREQ: J119.3 R11029.2(B[0]) U291.4(B)
JTAG_DEBUGGER_TCK: J119.57 R10948.1(A[0])
JTAG_DEBUGGER_TMS: J119.58 R10938.2(B[0])
JTAG_DEBUGGER_TRST_N: J119.54 R10943.2(B[0])
JTAG_ICD_RESET: R54.1(A[0]) U5.2
JTAG_ICD_TCK: R48.1(A[0]) R49.1(A[0]) U4.2
JTAG_ICD_TDI: R52.1(A[0]) U5.3
JTAG_ICD_TDO: R50.1(A[0]) R51.1(A[0]) U4.1
JTAG_ICD_TMS: R46.1(A[0]) R47.1(A[0]) U4.3
JTAG_T_RESERV0: R55.1(A[0]) U3.1(PB6)
JTAG_T_RESERV1: R60.1(A[0]) U3.5(PF4)
JTAG_T_TCK: R49.2(B[0]) U3.30(PF2)
JTAG_T_TDO: R50.2(B[0]) U3.53(PD6)
JTAG_T_TMS: R46.2(B[0]) U3.29(PF1)
L_JTAG_DEBUGGER_PRDY: R10950.1(A[0]) R11025.2(B[0]) U290.4(B)
L_JTAG_DEBUGGER_PREQ: R10949.1(A[0]) R11032.2(B[0])
L_PWRGOOD_PLTRST_CORE_PWROK: R10939.2(B[0]) R11073.1(A[0]) U289.4(B)
LT8640_INT_VCC: C16.1(A[0]) R103.1(A[0]) U10.2(INTVCC)
NEXTDBG: R75.2(B[0]) R115.2(B[0]) U3.24(PA7)
O1: J119.52 R10952.1(A[0]) R10953.1(A[0])
O2: J119.56 R10954.1(A[0]) R10955.1(A[0])
PCU2_SMB_CLK: R3P5.2(B[0]) R3P7.2(B[0]) U3P1.2(SCLA)
PCU2_SMB_DAT: R3P2.2(B[0]) R3P6.2(B[0]) U3P1.3(SDAA)
PCU_RXD: R71.2(B[0]) R124.1(A[0])
PCU_TXD: R65.2(B[0]) R125.1(A[0])
PWRGOOD_PLTRST_CORE_PWROK: J119.39 J119.46 R11020.2(B[0])
R_ICD_RESET: R35.2(B[0]) R36.1(A[0]) R54.2(B[0])
R_ICD_TCK: R37.2(B[0]) R38.1(A[0]) R48.2(B[0])
R_ICD_TDI: R41.1(A[0]) R52.2(B[0]) R53.2(B[0])
R_ICD_TDO: R39.2(B[0]) R40.1(A[0]) R51.2(B[0])
R_ICD_TMS: R42.2(B[0]) R43.1(A[0]) R47.2(B[0])
R_TIVA_DEBUG_RX: R33.1(A[0]) R57.2(B[0]) R58.1(A[0])
R_TIVA_DEBUG_TX: R32.1(A[0]) R34.2(B[0]) R56.1(A[0])
RESET_RSMRST_SYSTEM_RESET_N_SW_: D133.A R10942.2(B[0])
SLP_3P3_S0IX_B: Q3N1.3(D2) R1C1.2(B[0]) R2C5.2(B[0])
SOC_HDMI_DDSP_HPD: J4.2 Q1C1.3(C) R6.2(B[0])
SOC_SLP_S0IX_B: J4.104 R2C6.1(A[0]) R2C8.2(B[0])
SPRINGVILLE-1_RESET: J4.103 R11233.1(A[0])
SPRINGVILLE-2_RESET: J4.108 R11232.1(A[0])
SW_DEBUGGER_JTAG_TDI: R10937.2(B[0]) R10952.2(B[0]) R10954.2(B[0])
T_DISCONNECT: R70.2(B[0]) R73.1(A[0]) R74.2(B[0]) U3.61(PD0)
TIVA_DEBUG_RX: R57.1(A[0]) R122.1(A[0])
TIVA_DEBUG_TX: R34.1(A[0]) R123.1(A[0])
UNNAMED_18_PCA9517A_I46_EN: R3P1.2(B[0]) U3P1.5(EN)
UNNAMED_18_RESN_I62_B: CR3P1.1(C) R3P3.2(B[0])
UNNAMED_18_RESN_I63_B: CR3P2.1(C) R3P4.2(B[0])
UNNAMED_31_RESN_I19_A: L1M1.10(TD_D) R1M1.1(A[0])
UNNAMED_31_RESN_I22_A: L1M1.7(TD_C) R1M2.1(A[0])
UNNAMED_31_RESN_I23_A: L1M1.4(TD_B) R1M3.1(A[0])
UNNAMED_31_RESN_I24_A: L1M1.1(TD_A) R1M4.1(A[0])
UNNAMED_53_CHOKE4P_I472_IN2: J4P1.8(SSTXN) L4P3.3(IN_2) U1P1.1(CH1) U1P1.10(NC_10)
UNNAMED_53_CHOKE4P_I472_OUT1: J4P1.9(SSTXP) L4P3.2(OUT_1) U1P1.2(CH2) U1P1.9(NC_9)
UNNAMED_53_CHOKE4P_I473_IN2: J4P1.5(SSRXN) L4P2.3(IN_2) U1P1.4(CH3) U1P1.7(NC_7)
UNNAMED_53_CHOKE4P_I473_OUT1: J4P1.6(SSRXP) L4P2.2(OUT_1) U1P1.5(CH4) U1P1.6(NC_6)
UNNAMED_53_RESN_I450_B: R4P10.2(B[0]) U4P5.4(EN1)
UNNAMED_54_FET_I18_B: Q1C2.1(B) R1C1.1(A[0]) R98.1(A[0])
UNNAMED_54_MOSFETNDUAL6P_I46_D1: Q3N1.5(G2) Q3N1.6(D1) R2C4.2(B[0])
UNNAMED_54_MOSFETNDUAL6P_I46_G1: Q3N1.2(G1) R2C6.2(B[0])
UNNAMED_211_CAPN_I38_A: C4N9.1(A[0]) F4N1.1(A[0]) J4N1.18(IO18)
USB3_TX0_C_N: C4P4.1(A[0]) L4P3.4(OUT_2)
USB3_TX0_C_P: C4P3.1(A[0]) L4P3.1(IN_1)
USB_5VMICROB: C1D3.1(A[0]) C4P7.1(A[0]) J1N2.1(VCC) R109.2(B[0]) R836.1(A[0]) U4P5.8(OUT2) U4P5.9(OUT1)
USB_DN1: J4.40 R15.2(B[0])
USB_DN2: J4.43 R79.2(B[0])
USB_DP1: J4.38 R13.2(B[0])
USB_DP2: J4.41 R77.2(B[0])
USB_P_DN3: L4P5.4(OUT_2) R96.1(A[0])
USB_P_DP3: L4P5.1(IN_1) R97.1(A[0])
VHDMI: C1C5.1(A[0]) C1C6.1(A[0]) C3P4.1(A[0]) C4N15.1(A[0]) CR3P1.2(A) CR3P2.2(A) F4N1.2(B[0]) Q1C100.5(D) Q1C100.6 Q1C100.7 Q1C100.8 R3P1.1(A[0]) U3P1.8(VCCB)
VHDMI_EN_N: C1C6.2(B[0]) C1C8.1(A[0]) J4.99 Q1C100.4(G) R1C16.1(A[0]) R1C17.2(B[0])
VTREF: C2079.2(B[0]) C2101.1(A[0]) FB16.2 J119.43 R10951.1(A[0]) U289.1(VCCA)
N28085: R4P4.2(B[0]) U4P2.5(EN2)
N28087: R4P2.2(B[0]) U4P2.4(EN1)
N28089: R4P3.1(A[0]) U4P2.7(ILIM)
N28111: R4P1.2(B[0]) U4P2.6(FAULT2_N) U4P2.10(FAULT1_N)
N33106: R1P2.2(B[0]) U1P2.4(EN1)
N33108: R1P3.2(B[0]) U1P2.5(EN2)
N33110: R4P13.1(A[0]) U1P2.7(ILIM)
N33118: R1P1.2(B[0]) U1P2.6(FAULT2_N) U1P2.10(FAULT1_N)
N42099: R76.2(B[0]) U2L3.4(B)
N42111: R64.2(B[0]) U2L2.3(A)
N42143: R10382.1(A[0]) U2L3.5(DIR)
N42161: R120.1(A[0]) U2L2.5(DIR)
N201254: R30.2(B[0]) U3.32(NWAKE)
N201346: C2N3.1(A[0]) C2N5.1(A[0]) C2N6.1(A[0]) U3.25(VDDC) U3.56(VDDC1)
N201490: R28.1(A[0]) U3.34(XOSC0)
N203090: C1.2(B[0]) U3.41(OSC1) X1.2
N204165: C2.2(B[0]) U3.40(OSC0) X1.1
N219413: R21.2(B[0]) U3.43(PD4)
N219434: R18.2(B[0]) U3.44(PD5)
N221615: R4P12.2(B[0]) U4P5.5(EN2)
N221627: R4P11.1(A[0]) U4P5.7(ILIM)
N221633: R4P9.2(B[0]) U4P5.6(FAULT2_N) U4P5.10(FAULT1_N)
N225688: R108.1(A[0]) R109.1(A[0]) U3.46(PB1/USB0VUSB)
N232455: R95.1(A[0]) U9.10(DCD#)
N232463: R93.1(A[0]) U9.9(DSR#)
N232467: R92.1(A[0]) U9.6(RI#)
N232751: R97.2(B[0]) U9.15(USBDP)
N232773: R96.2(B[0]) U9.16(USBDM)
N233073: R94.2(B[0]) U9.19(RESET#)
N233315: D2.4(A2) R90.2
N233359: D2.3(A1) R89.2
N233395: D2.1(C1) U9.23(CBUS0)
N233407: D2.2(C2) U9.22(CBUS1)
N234973: J1N4.3(DP) L4P5.2(OUT_1) U4P6.1(CH1) U4P6.10(NC_10)
N234985: J1N4.2(DN) L4P5.3(IN_2) U4P6.2(CH2) U4P6.9(NC_9)
N241337: R1P6.2(B[0]) U1P4.4(EN1)
N241343: R1P7.2(B[0]) U1P4.5(EN2)
N241349: R4P14.1(A[0]) U1P4.7(ILIM)
N241355: R1P5.2(B[0]) U1P4.6(FAULT2_N) U1P4.10(FAULT1_N)
N351330: R11.2(B[0]) U3.49(PC3/TDO/SWO)
N351491: R5.2(B[0]) U3.50(PC2/TDI)
N351562: R10.2(B[0]) U3.51(PC1/TMS /SWDIO)
N351629: R4.2(B[0]) U3.52(PC0/TCK/SWCLK)
N351992: L4P1.1(IN_1) R13.1(A[0])
N352004: L4P1.4(OUT_2) R15.1(A[0])
N352148: L1P1.1(IN_1) R77.1(A[0])
N352158: L1P1.4(OUT_2) R79.1(A[0])
N383837: J4.27 R125.2(B[0])
N383841: J4.29 R124.2(B[0])
N383913: J4.49 R123.2(B[0])
N383917: J4.51 R122.2(B[0])
N384119: J4.64 R63.1(A[0]) R66.2(B[0])
N385160: Q1C1.1(B) R3A1.1(A[0]) R4N1.1(A[0])
N386590: R1P4.1(A[0]) U9.11(CTS#)
N387066: R88.1(A[0]) U9.1(TXD)
N387147: R91.1(A[0]) U9.5(RXD)
N399321: R102.1(A[0]) R103.2(B[0]) R104.1(A[0])
N399325: R104.2(B[0]) U10.17(SYNC)
N399469: C22.2(B[0]) L1.1(INA) U10.8(SW) U10.9(SW1) U10.21(SW2) U10.22(SW3)
N399473: C18.1(A[0]) R106.2(B[0]) R107.1(A[0]) U10.20(FB)
N399617: R105.2(B[0]) U10.19(PG)
N399669: C22.1(A[0]) U10.3(BST)
N399721: R99.1(A[0]) R100.2(B[0]) U10.14(EN/UV)
N399781: R126.1(A[0]) U10.15(RT)
N399791: C17.1(A[0]) U10.16(TR/SS)
N399895: R101.1(A[0]) U10.1(BIAS)
N401219: R3.1(A[0]) U3.58(PB4)
N401226: R9.1(A[0]) U3.57(PB5)
N401233: R14.1(A[0]) U3.48(PB3/I2C0SDA)
N401240: R16.1(A[0]) U3.47(PB2/I2C0SCL)
N401249: R17.1(A[0]) R836.2(B[0]) U3.45(PB0/USB0ID)
N401306: R19.1(A[0]) U3.4(PB7)
N402412: R24.1(A[0]) U3.13(PC7)
N402427: R25.1(A[0]) U3.14(PC6)
N402441: R26.1(A[0]) U3.15(PC5)
N402450: R27.1(A[0]) U3.16(PC4)
N403421: R114.1(A[0]) U3.28(PF0)
N403437: R1.1(A[0]) U3.63(PD2)
N403444: R12.1(A[0]) U3.64(PD3)
N403788: R7.1(A[0]) U3.62(PD1)
N404895: R111.1(A[0]) U3.6(PE3)
N404904: R20.1(A[0]) U3.7(PE2)
N404911: R22.1(A[0]) U3.8(PE1)
N404918: R112.1(A[0]) U3.9(PE0)
N404927: R8.1(A[0]) R110.2(B[0]) U3.59(PE4)
N404982: R2.1(A[0]) U3.60(PE5)
N412302: R23.1(A[0]) U3.10(PD7)
N444230: R65.1(A[0]) U2L2.4(B)
N444358: R71.1(A[0]) U2L3.3(A)
N457831: J2.12 U5.8
N458097: J2.16 U6.7
N459079: J2.20 U7.1
N462327: D1.2(A) R12.2(B[0])
N506634: C4B1.1(A[0]) R1M1.2(B[0]) R1M2.2(B[0]) R1M3.2(B[0]) R1M4.2(B[0])
N511938: J4.56 R72.1(A[0])
N511942: J4.58 R69.1(A[0])
N511946: J4.60 R68.1(A[0])
N512114: J4.62 R67.1(A[0])
N514726: R4P8.2(B[0]) U4P3.5(EN2)
N514730: R4P7.2(B[0]) U4P3.4(EN1)
N514734: R4P5.1(A[0]) U4P3.7(ILIM)
N514738: R4P6.2(B[0]) U4P3.6(FAULT2_N) U4P3.10(FAULT1_N)
N534106: J2.6 U4.8
N534134: J2.4 U4.7
N534394: J2.2 U4.6
N535229: J2.8 U5.6
N535246: J2.10 U5.7
N535539: R56.2(B[0]) U6.3
N535546: R58.2(B[0]) U6.2
N535557: R59.2(B[0]) U6.1
N535561: J2.18 U6.8
N535595: J2.14 U6.6
N535834: R60.2(B[0]) U7.8
N535989: R70.1(A[0]) U8.8
N535993: J2.5 U8.2
N536003: R75.1(A[0]) U8.7
N536013: J2.9 U8.1
N612131: R55.2(B[0]) U5.1
N613003: R32.2(B[0]) U3.17(PA0)
N613052: R33.2(B[0]) U3.18(PA1)
N613101: R38.2(B[0]) U3.19(PA2)
N613149: R43.2(B[0]) U3.20(PA3)
N613197: R40.2(B[0]) U3.21(PA4)
N613245: R41.2(B[0]) U3.22(PA5)
N613293: R36.2(B[0]) U3.23(PA6)
N655988: Q1C2.3(C) R1C2.2(B[0]) R1C3.2(B[0]) R1C4.2(B[0]) R1C5.2(B[0]) R1C6.2(B[0]) R1C7.2(B[0]) R1C8.2(B[0]) R1C9.2(B[0])
N768751: J118.5 U273.1
N768795: R10937.1(A[0]) U273.8
N768847: J118.9 U274.2
N768855: J118.11 U274.1
N769021: R10939.1(A[0]) U274.7
N769049: R10942.1(A[0]) U274.8
N769063: FB16.1 J118.12 U275.4
N769073: J118.1 U273.3
N769085: J118.3 U273.2
N769101: J118.7 U274.3
N769141: R10943.1(A[0]) U273.6
N769191: R10947.1(A[0]) U273.7
N769287: R10938.1(A[0]) U274.6
N769463: J118.4 U275.1
N769473: R10948.2(B[0]) U275.8
N769477: J118.8 U275.2
N769489: J118.10 U275.3
N769545: R10949.2(B[0]) U275.7
N769549: R10950.2(B[0]) U275.6
N837044: D133.K J119.48 R10951.2(B[0])
N845980: R11018.1(A[0]) U289.5(DIR)
N846168: R11020.1(A[0]) U289.3(A)
N1010968: R11026.1(A[0]) U290.5(DIR)
N1011178: R11028.1(A[0]) U290.3(A)
N1011330: R11030.1(A[0]) U291.5(DIR)
N1011500: R11032.1(A[0]) U291.3(A)
N1020648: R11232.2(B[0]) S4.1 S4.2
N1020665: R11233.2(B[0]) S5.1 S5.2

Pads without a net: J1 1 7; J1N2 4; J1N4 4; J2 7; J4 26 31 44 54 59 65 78 80 105 106 107 109 110 111 112 113 114 115 116 117 118 119 120; J4N1 13 14; J4P1 2 3; J119 4 6 9 10 11 12 15 16 17 18 21 22 23 24 27 28 29 30 33 34 35 36 40 41 42 44 45 47 51 53 55; U1 4 5; U1P3 4 5 6 7; U2 3 4 5 6; U3 33 36; U4N1 2 9; U4P1 4 5 6 7; U4P4 4 5 6 7; U4P6 4 5 6 7; U5 4 5; U6 4 5; U7 2 3 4 5 6 7; U8 3 4 5 6; U9 2 3 8 12 13 14 24 27 28; U273 4 5; U274 4 5; U275 5

## Via types
v1: diameter 0.61, hole 0.305, TOP to BOTTOM, 500 vias
v2: diameter 0.635, hole 0.305, TOP to BOTTOM, 170 vias
v3: diameter 0.635, hole 0.318, TOP to BOTTOM, 12 vias

## Routing (per net, layer and track width the routed paths; a pad name or vN(x,y) marks a point on that pad's centre or on a via; arc(x,y) is an arc through that point)
3.3VD_TIVA: length 41.5
  TOP w0.254: U3.42 61.34,79.06 v1(60.91,79.49) ; v1(57.54,74.9) 57.54,74.35 57.55,74.33 U3.26 ; v1(58.37,81.81) 58.37,82.02 58.05,82.34 U3.54 ; U4.5 47.5,62.33 47.27,62.1 v1(47.27,61.85) ; U4.4 47.62,63.61 47.3,63.93 v1(47.3,64.36)
  TOP w0.305: 49.36,81.56 48.51,81.56 48.51,81.56 C2N1.1 46.46,81.56 v1(46.46,81.56) ; 49.36,81.56 C2N2.1 ; 49.36,81.56 U3.2 51.2,81.56 52.89,81.56 v1(52.94,81.61) ; v1(60.74,76.02) 61.27,76.56 U3.37 ; R74.1 59.21,50.16 v1(60.32,50.16) ; U3.11 51.22,77.04 52.48,77.04 v1(52.76,77.32)
  TOP w0.381: 5.84,55.24 5.89,55.2 J4.50 ; J4.52 5.92,54.4 5.84,54.48 ; C7.1 47.28,50.72 47.28,51.45 46.77,51.97 J2.1
  TOP w0.508: 4.16,54.74 C8.1 ; C8.1 4.61,55.19 ; C8.1 4.16,55.63 ; C20.1 15.37,50.75 ; C20.1 14.92,50.31 ; C20.1 15.81,50.31 ; R66.1 2.17,47.62 v2(2.16,47.62) ; J4.61 14.21,50.4 ; C7.1 47.28,50.67 v1(47.28,49.81)
  BOTTOM w0.254: R115.1 C2B3.1 57.62,74.26 57.54,74.35 v1(57.54,74.9) ; R113.1 62.89,76.95 C2B2.1 60.96,76.24 v1(60.74,76.02) ; C2N4.1 58.57,82.01 v1(58.37,81.81)
  BOTTOM w0.305: R110.1 52.99,81.56 v1(52.94,81.61) ; v1(52.76,77.32) 52.1,77.32 51.85,77.06 51.21,77.06 C2B1.1
  vias: v1(5.21,55.5) v1(5.21,54.61) v1(16.89,50.55) v1(16.89,49.53)
12V_VIN_TIVA: length 7.6
  TOP w0.254: U10.4 75.44,8.84 ; U10.13 70.34,8.84
  TOP w0.508: 12.15,44 J4.77 13.95,44 ; 15.2,43.92 C1990.1 ; C1990.1 15.64,43.47 ; C1990.1 15.64,44.36 ; 13.05,42.79 J4.79 ; J4.79 13.95,43.2 ; J4.79 12.15,43.2
  vias: v1(14.61,43.94) v1(64.34,10.41) v1(64.47,7.49) v1(65.13,10.41) v1(65.13,9.27) v1(65.31,7.49) v1(65.91,10.41) v1(65.91,9.27) v1(66.1,7.49) v1(66.7,10.41) v1(66.7,9.27) v1(67.49,10.41) v1(67.49,9.27) v1(68.3,9.27) v1(69.11,9.27) v1(80.75,6.68) v1(82.48,6.76) v1(83.88,6.65) v1(84.31,8.1) v1(85.27,6.68) v1(85.42,8.15) v2(14.61,43.05) v2(64.26,9.22) v2(66.94,7.49) v2(86.85,6.68) v2(86.9,8.15)
